# EAGLE board TMP006 Breakout-Panel-v11 (EAGLE 6.5.0), part 1 of 2
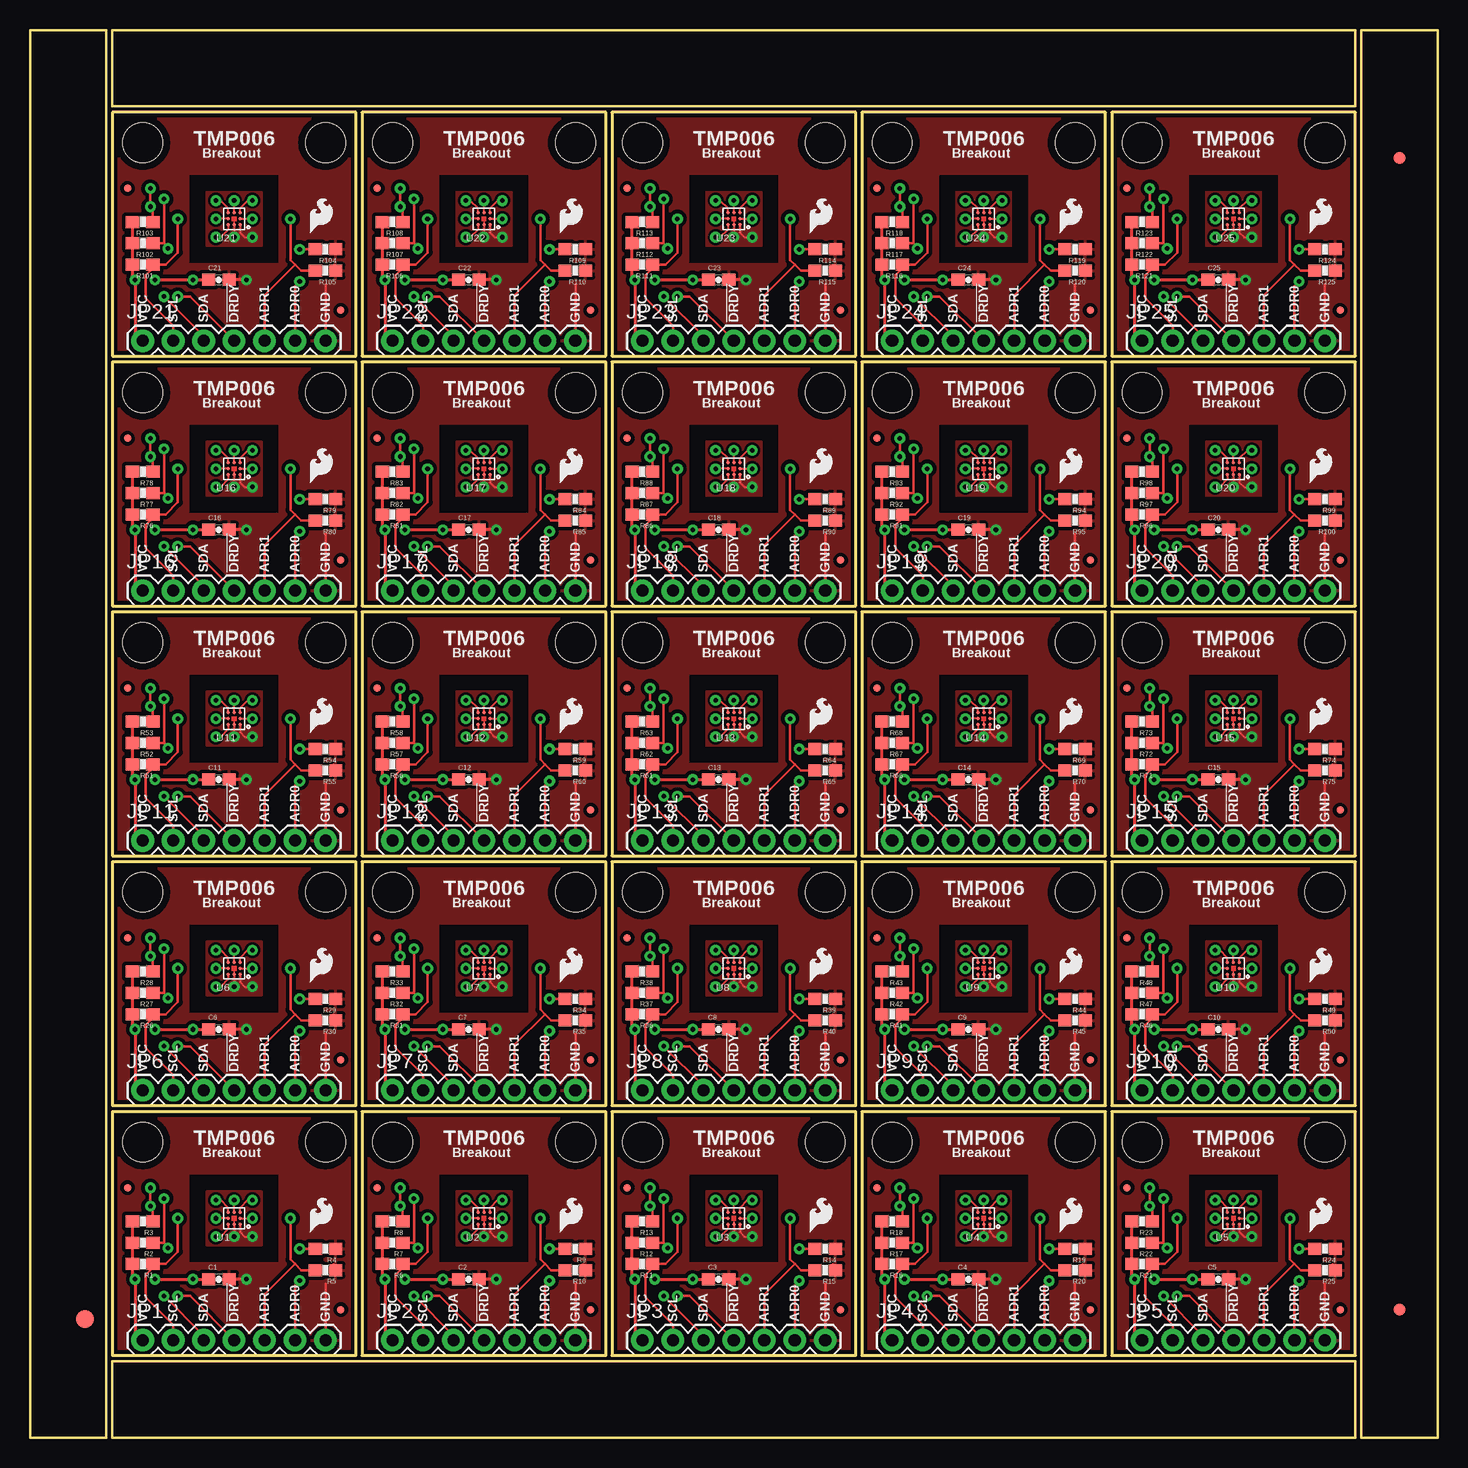
[diagram p0: board, top side]
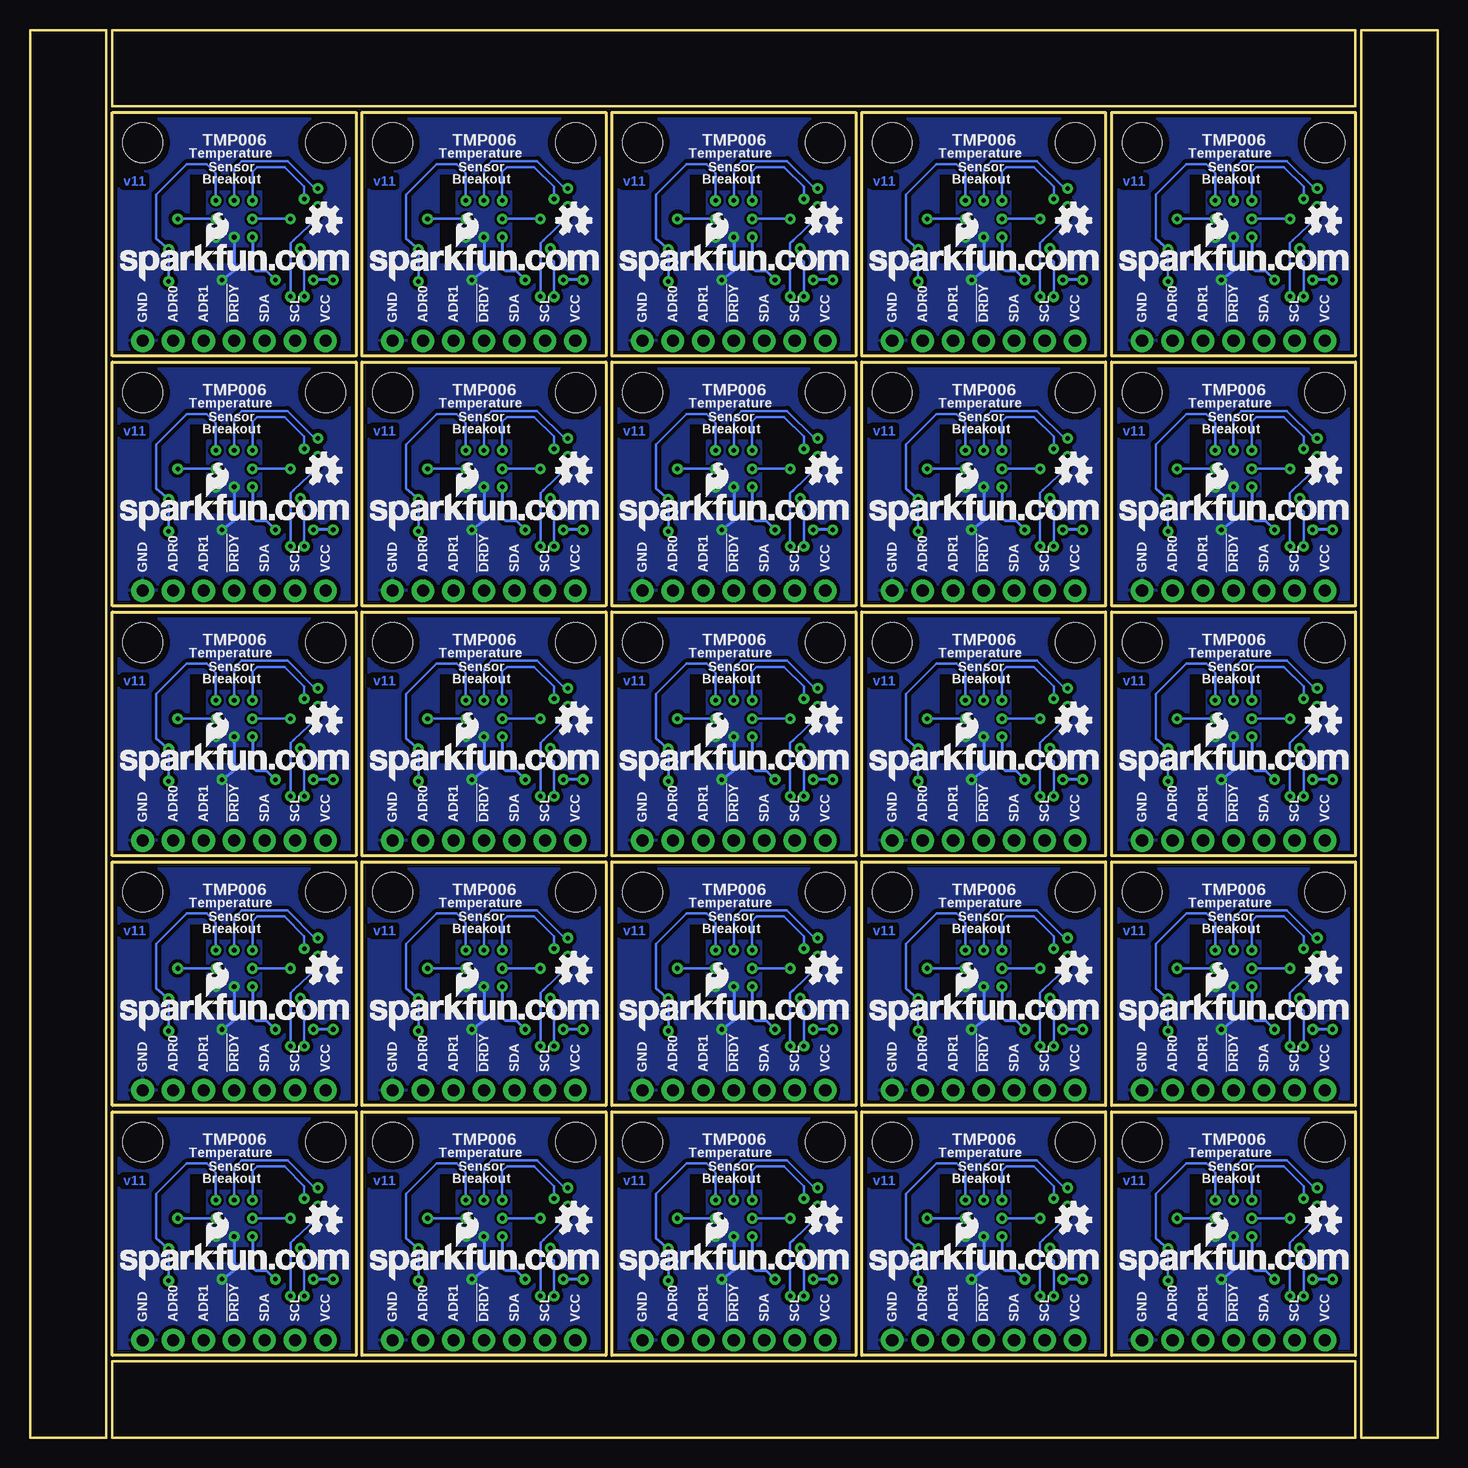
[diagram p1: board, bottom side, seen from below]

Size 117.35 x 117.35 mm. Coordinates in mm from the lower left corner, seen from the top.
Outline: 6.86,27.18 6.86,6.86 27.18,6.86 27.18,27.18 6.86,27.18
Outline: 27.69,27.18 27.69,6.86 48.01,6.86 48.01,27.18 27.69,27.18
Outline: 48.51,27.18 48.51,6.86 68.83,6.86 68.83,27.18 48.51,27.18
Outline: 69.34,27.18 69.34,6.86 89.66,6.86 89.66,27.18 69.34,27.18
Outline: 90.17,27.18 90.17,6.86 110.49,6.86 110.49,27.18 90.17,27.18
Outline: 6.86,48.01 6.86,27.69 27.18,27.69 27.18,48.01 6.86,48.01
Outline: 27.69,48.01 27.69,27.69 48.01,27.69 48.01,48.01 27.69,48.01
Outline: 48.51,48.01 48.51,27.69 68.83,27.69 68.83,48.01 48.51,48.01
Outline: 69.34,48.01 69.34,27.69 89.66,27.69 89.66,48.01 69.34,48.01
Outline: 90.17,48.01 90.17,27.69 110.49,27.69 110.49,48.01 90.17,48.01
Outline: 6.86,68.83 6.86,48.51 27.18,48.51 27.18,68.83 6.86,68.83
Outline: 27.69,68.83 27.69,48.51 48.01,48.51 48.01,68.83 27.69,68.83
Outline: 48.51,68.83 48.51,48.51 68.83,48.51 68.83,68.83 48.51,68.83
Outline: 69.34,68.83 69.34,48.51 89.66,48.51 89.66,68.83 69.34,68.83
Outline: 90.17,68.83 90.17,48.51 110.49,48.51 110.49,68.83 90.17,68.83
Outline: 6.86,89.66 6.86,69.34 27.18,69.34 27.18,89.66 6.86,89.66
Outline: 27.69,89.66 27.69,69.34 48.01,69.34 48.01,89.66 27.69,89.66
Outline: 48.51,89.66 48.51,69.34 68.83,69.34 68.83,89.66 48.51,89.66
Outline: 69.34,89.66 69.34,69.34 89.66,69.34 89.66,89.66 69.34,89.66
Outline: 90.17,89.66 90.17,69.34 110.49,69.34 110.49,89.66 90.17,89.66
Outline: 6.86,110.49 6.86,90.17 27.18,90.17 27.18,110.49 6.86,110.49
Outline: 27.69,110.49 27.69,90.17 48.01,90.17 48.01,110.49 27.69,110.49
Outline: 48.51,110.49 48.51,90.17 68.83,90.17 68.83,110.49 48.51,110.49
Outline: 69.34,110.49 69.34,90.17 89.66,90.17 89.66,110.49 69.34,110.49
Outline: 90.17,110.49 90.17,90.17 110.49,90.17 110.49,110.49 90.17,110.49
Outline: 6.35,0 6.35,117.35 0,117.35 0,0 6.35,0
Outline: 6.86,0 110.49,0 110.49,6.35 6.86,6.35 6.86,0
Outline: 117.35,0 117.35,117.35 111,117.35 111,0 117.35,0
Outline: 110.49,117.35 6.86,117.35 6.86,111 110.49,111 110.49,117.35
Copper layers (1*16): Top 0.035mm / dielectric 1.5mm / Bottom 0.035mm
Design rules "default": minimum track width 6mil, minimum drill 15mil, track to track 8mil, track to pad 8mil, pad to pad 8mil, via to via 8mil, smd to smd 8mil, copper to edge 8mil, drill to drill 8mil, minimum pad ring 12mil, minimum via ring 10mil, stop-mask expansion 4mil, vias tented up to drill 20mil, thermal gap 10mil
tRestrict: area 17.1,17.7 to 17.4,17.9; area 17.7,17.7 to 17.9,17.9; area 38,17.7 to 38.2,17.9; area 38.5,17.7 to 38.7,17.9; area 58.8,17.7 to 59.1,17.9; area 59.3,17.7 to 59.6,17.9; area 79.6,17.7 to 79.9,17.9; area 80.1,17.7 to 80.4,17.9; area 100.5,17.7 to 100.7,17.9; area 101,17.7 to 101.2,17.9; area 17.1,38.5 to 17.4,38.7; area 17.7,38.5 to 17.9,38.7; area 38,38.5 to 38.2,38.7; area 38.5,38.5 to 38.7,38.7; area 58.8,38.5 to 59.1,38.7; area 59.3,38.5 to 59.6,38.7; area 79.6,38.5 to 79.9,38.7; area 80.1,38.5 to 80.4,38.7; area 100.5,38.5 to 100.7,38.7; area 101,38.5 to 101.2,38.7; area 17.1,59.3 to 17.4,59.6; area 17.7,59.3 to 17.9,59.6; area 38,59.3 to 38.2,59.6; area 38.5,59.3 to 38.7,59.6; area 58.8,59.3 to 59.1,59.6; area 59.3,59.3 to 59.6,59.6; area 79.6,59.3 to 79.9,59.6; area 80.1,59.3 to 80.4,59.6; area 100.5,59.3 to 100.7,59.6; area 101,59.3 to 101.2,59.6; area 17.1,80.1 to 17.4,80.4; area 17.7,80.1 to 17.9,80.4; area 38,80.1 to 38.2,80.4; area 38.5,80.1 to 38.7,80.4; area 58.8,80.1 to 59.1,80.4; area 59.3,80.1 to 59.6,80.4; area 79.6,80.1 to 79.9,80.4; area 80.1,80.1 to 80.4,80.4; area 100.5,80.1 to 100.7,80.4; area 101,80.1 to 101.2,80.4; area 17.1,101 to 17.4,101.2; area 17.7,101 to 17.9,101.2; area 38,101 to 38.2,101.2; area 38.5,101 to 38.7,101.2; area 58.8,101 to 59.1,101.2; area 59.3,101 to 59.6,101.2; area 79.6,101 to 79.9,101.2; area 80.1,101 to 80.4,101.2; area 100.5,101 to 100.7,101.2; area 101,101 to 101.2,101.2

## Footprints (pad centres in the part's own frame; a part is rotated, then mirrored left to right if it is on the bottom)
0603-CAP = smd 1.1 x 1: 1 -0.85,0; 2 0.85,0
FIDUCIAL-1.5X3 = smd 1.5 x 1.5: 1 0,0
FIDUCIAL-1X2 = smd 1 x 1: 1 0,0
MICRO-FIDUCIAL = smd 0.635 x 0.635: 1 0,0
1X07 = drill 1.016 pad 1.88: 1 0,0; 2 2.54,0; 3 5.08,0; 4 7.62,0; 5 10.16,0; 6 12.7,0; 7 15.24,0
0603-RES = smd 1.1 x 1: 1 -0.85,0; 2 0.85,0
STAND-OFF = hole 3.302: 0,0
BGA8DS = smd 0.305 x 0.305: A1 0.5,-0.5; A2 0,-0.5; A3 -0.5,-0.5; B1 0.5,0; B3 -0.5,0; C1 0.5,0.5; C2 0,0.5; C3 -0.5,0.5

## Placement (x,y rotation side)
C1  0.1uF  [0603-CAP]  15.75,13.21 0 top
C2  0.1uF  [0603-CAP]  36.58,13.21 0 top
C3  0.1uF  [0603-CAP]  57.4,13.21 0 top
C4  0.1uF  [0603-CAP]  78.23,13.21 0 top
C5  0.1uF  [0603-CAP]  99.06,13.21 0 top
C6  0.1uF  [0603-CAP]  15.75,34.04 0 top
C7  0.1uF  [0603-CAP]  36.58,34.04 0 top
C8  0.1uF  [0603-CAP]  57.4,34.04 0 top
C9  0.1uF  [0603-CAP]  78.23,34.04 0 top
C10  0.1uF  [0603-CAP]  99.06,34.04 0 top
C11  0.1uF  [0603-CAP]  15.75,54.86 0 top
C12  0.1uF  [0603-CAP]  36.58,54.86 0 top
C13  0.1uF  [0603-CAP]  57.4,54.86 0 top
C14  0.1uF  [0603-CAP]  78.23,54.86 0 top
C15  0.1uF  [0603-CAP]  99.06,54.86 0 top
C16  0.1uF  [0603-CAP]  15.75,75.69 0 top
C17  0.1uF  [0603-CAP]  36.58,75.69 0 top
C18  0.1uF  [0603-CAP]  57.4,75.69 0 top
C19  0.1uF  [0603-CAP]  78.23,75.69 0 top
C20  0.1uF  [0603-CAP]  99.06,75.69 0 top
C21  0.1uF  [0603-CAP]  15.75,96.52 0 top
C22  0.1uF  [0603-CAP]  36.58,96.52 0 top
C23  0.1uF  [0603-CAP]  57.4,96.52 0 top
C24  0.1uF  [0603-CAP]  78.23,96.52 0 top
C25  0.1uF  [0603-CAP]  99.06,96.52 0 top
E$1  [FIDUCIAL-1.5X3]  4.57,9.91 0 top
E$4  [FIDUCIAL-1X2]  114.17,10.67 0 top
E$5  [FIDUCIAL-1X2]  114.17,106.68 180 top
FID1  FIDUCIALUFIDUCIAL  [MICRO-FIDUCIAL]  8.13,20.83 0 top
FID2  FIDUCIALUFIDUCIAL  [MICRO-FIDUCIAL]  25.91,10.67 0 top
FID3  FIDUCIALUFIDUCIAL  [MICRO-FIDUCIAL]  28.96,20.83 0 top
FID4  FIDUCIALUFIDUCIAL  [MICRO-FIDUCIAL]  46.74,10.67 0 top
FID5  FIDUCIALUFIDUCIAL  [MICRO-FIDUCIAL]  49.78,20.83 0 top
FID6  FIDUCIALUFIDUCIAL  [MICRO-FIDUCIAL]  67.56,10.67 0 top
FID7  FIDUCIALUFIDUCIAL  [MICRO-FIDUCIAL]  70.61,20.83 0 top
FID8  FIDUCIALUFIDUCIAL  [MICRO-FIDUCIAL]  88.39,10.67 0 top
FID9  FIDUCIALUFIDUCIAL  [MICRO-FIDUCIAL]  91.44,20.83 0 top
FID10  FIDUCIALUFIDUCIAL  [MICRO-FIDUCIAL]  109.22,10.67 0 top
FID11  FIDUCIALUFIDUCIAL  [MICRO-FIDUCIAL]  8.13,41.66 0 top
FID12  FIDUCIALUFIDUCIAL  [MICRO-FIDUCIAL]  25.91,31.5 0 top
FID13  FIDUCIALUFIDUCIAL  [MICRO-FIDUCIAL]  28.96,41.66 0 top
FID14  FIDUCIALUFIDUCIAL  [MICRO-FIDUCIAL]  46.74,31.5 0 top
FID15  FIDUCIALUFIDUCIAL  [MICRO-FIDUCIAL]  49.78,41.66 0 top
FID16  FIDUCIALUFIDUCIAL  [MICRO-FIDUCIAL]  67.56,31.5 0 top
FID17  FIDUCIALUFIDUCIAL  [MICRO-FIDUCIAL]  70.61,41.66 0 top
FID18  FIDUCIALUFIDUCIAL  [MICRO-FIDUCIAL]  88.39,31.5 0 top
FID19  FIDUCIALUFIDUCIAL  [MICRO-FIDUCIAL]  91.44,41.66 0 top
FID20  FIDUCIALUFIDUCIAL  [MICRO-FIDUCIAL]  109.22,31.5 0 top
FID21  FIDUCIALUFIDUCIAL  [MICRO-FIDUCIAL]  8.13,62.48 0 top
FID22  FIDUCIALUFIDUCIAL  [MICRO-FIDUCIAL]  25.91,52.32 0 top
FID23  FIDUCIALUFIDUCIAL  [MICRO-FIDUCIAL]  28.96,62.48 0 top
FID24  FIDUCIALUFIDUCIAL  [MICRO-FIDUCIAL]  46.74,52.32 0 top
FID25  FIDUCIALUFIDUCIAL  [MICRO-FIDUCIAL]  49.78,62.48 0 top
FID26  FIDUCIALUFIDUCIAL  [MICRO-FIDUCIAL]  67.56,52.32 0 top
FID27  FIDUCIALUFIDUCIAL  [MICRO-FIDUCIAL]  70.61,62.48 0 top
FID28  FIDUCIALUFIDUCIAL  [MICRO-FIDUCIAL]  88.39,52.32 0 top
FID29  FIDUCIALUFIDUCIAL  [MICRO-FIDUCIAL]  91.44,62.48 0 top
FID30  FIDUCIALUFIDUCIAL  [MICRO-FIDUCIAL]  109.22,52.32 0 top
FID31  FIDUCIALUFIDUCIAL  [MICRO-FIDUCIAL]  8.13,83.31 0 top
FID32  FIDUCIALUFIDUCIAL  [MICRO-FIDUCIAL]  25.91,73.15 0 top
FID33  FIDUCIALUFIDUCIAL  [MICRO-FIDUCIAL]  28.96,83.31 0 top
FID34  FIDUCIALUFIDUCIAL  [MICRO-FIDUCIAL]  46.74,73.15 0 top
FID35  FIDUCIALUFIDUCIAL  [MICRO-FIDUCIAL]  49.78,83.31 0 top
FID36  FIDUCIALUFIDUCIAL  [MICRO-FIDUCIAL]  67.56,73.15 0 top
FID37  FIDUCIALUFIDUCIAL  [MICRO-FIDUCIAL]  70.61,83.31 0 top
FID38  FIDUCIALUFIDUCIAL  [MICRO-FIDUCIAL]  88.39,73.15 0 top
FID39  FIDUCIALUFIDUCIAL  [MICRO-FIDUCIAL]  91.44,83.31 0 top
FID40  FIDUCIALUFIDUCIAL  [MICRO-FIDUCIAL]  109.22,73.15 0 top
FID41  FIDUCIALUFIDUCIAL  [MICRO-FIDUCIAL]  8.13,104.14 0 top
FID42  FIDUCIALUFIDUCIAL  [MICRO-FIDUCIAL]  25.91,93.98 0 top
FID43  FIDUCIALUFIDUCIAL  [MICRO-FIDUCIAL]  28.96,104.14 0 top
FID44  FIDUCIALUFIDUCIAL  [MICRO-FIDUCIAL]  46.74,93.98 0 top
FID45  FIDUCIALUFIDUCIAL  [MICRO-FIDUCIAL]  49.78,104.14 0 top
FID46  FIDUCIALUFIDUCIAL  [MICRO-FIDUCIAL]  67.56,93.98 0 top
FID47  FIDUCIALUFIDUCIAL  [MICRO-FIDUCIAL]  70.61,104.14 0 top
FID48  FIDUCIALUFIDUCIAL  [MICRO-FIDUCIAL]  88.39,93.98 0 top
FID49  FIDUCIALUFIDUCIAL  [MICRO-FIDUCIAL]  91.44,104.14 0 top
FID50  FIDUCIALUFIDUCIAL  [MICRO-FIDUCIAL]  109.22,93.98 0 top
JP1  [1X07]  9.4,8.13 0 top
JP2  [1X07]  30.23,8.13 0 top
JP3  [1X07]  51.05,8.13 0 top
JP4  [1X07]  71.88,8.13 0 top
JP5  [1X07]  92.71,8.13 0 top
JP6  [1X07]  9.4,28.96 0 top
JP7  [1X07]  30.23,28.96 0 top
JP8  [1X07]  51.05,28.96 0 top
JP9  [1X07]  71.88,28.96 0 top
JP10  [1X07]  92.71,28.96 0 top
JP11  [1X07]  9.4,49.78 0 top
JP12  [1X07]  30.23,49.78 0 top
JP13  [1X07]  51.05,49.78 0 top
JP14  [1X07]  71.88,49.78 0 top
JP15  [1X07]  92.71,49.78 0 top
JP16  [1X07]  9.4,70.61 0 top
JP17  [1X07]  30.23,70.61 0 top
JP18  [1X07]  51.05,70.61 0 top
JP19  [1X07]  71.88,70.61 0 top
JP20  [1X07]  92.71,70.61 0 top
JP21  [1X07]  9.4,91.44 0 top
JP22  [1X07]  30.23,91.44 0 top
JP23  [1X07]  51.05,91.44 0 top
JP24  [1X07]  71.88,91.44 0 top
JP25  [1X07]  92.71,91.44 0 top
LOGO1  LOGO-SFESK  [SFE-LOGO-FLAME]  23.37,17.14 0 top
LOGO2  OSHW-LOGOS  [OSHW-LOGO-S]  9.53,18.16 0 bottom
LOGO3  LOGO-SFENEW  [SFE-NEW-WEBLOGO]  26.54,13.08 0 bottom
LOGO4  LOGO-SFESK  [SFE-LOGO-FLAME]  44.2,17.14 0 top
LOGO5  OSHW-LOGOS  [OSHW-LOGO-S]  30.35,18.16 0 bottom
LOGO6  LOGO-SFENEW  [SFE-NEW-WEBLOGO]  47.37,13.08 0 bottom
LOGO7  LOGO-SFESK  [SFE-LOGO-FLAME]  65.02,17.14 0 top
LOGO8  OSHW-LOGOS  [OSHW-LOGO-S]  51.18,18.16 0 bottom
LOGO9  LOGO-SFENEW  [SFE-NEW-WEBLOGO]  68.2,13.08 0 bottom
LOGO10  LOGO-SFESK  [SFE-LOGO-FLAME]  85.85,17.14 0 top
LOGO11  OSHW-LOGOS  [OSHW-LOGO-S]  72.01,18.16 0 bottom
LOGO12  LOGO-SFENEW  [SFE-NEW-WEBLOGO]  89.03,13.08 0 bottom
LOGO13  LOGO-SFESK  [SFE-LOGO-FLAME]  106.68,17.14 0 top
LOGO14  OSHW-LOGOS  [OSHW-LOGO-S]  92.84,18.16 0 bottom
LOGO15  LOGO-SFENEW  [SFE-NEW-WEBLOGO]  109.86,13.08 0 bottom
LOGO16  LOGO-SFESK  [SFE-LOGO-FLAME]  23.37,37.97 0 top
LOGO17  OSHW-LOGOS  [OSHW-LOGO-S]  9.53,38.99 0 bottom
LOGO18  LOGO-SFENEW  [SFE-NEW-WEBLOGO]  26.54,33.91 0 bottom
LOGO19  LOGO-SFESK  [SFE-LOGO-FLAME]  44.2,37.97 0 top
LOGO20  OSHW-LOGOS  [OSHW-LOGO-S]  30.35,38.99 0 bottom
LOGO21  LOGO-SFENEW  [SFE-NEW-WEBLOGO]  47.37,33.91 0 bottom
LOGO22  LOGO-SFESK  [SFE-LOGO-FLAME]  65.02,37.97 0 top
LOGO23  OSHW-LOGOS  [OSHW-LOGO-S]  51.18,38.99 0 bottom
LOGO24  LOGO-SFENEW  [SFE-NEW-WEBLOGO]  68.2,33.91 0 bottom
LOGO25  LOGO-SFESK  [SFE-LOGO-FLAME]  85.85,37.97 0 top
LOGO26  OSHW-LOGOS  [OSHW-LOGO-S]  72.01,38.99 0 bottom
LOGO27  LOGO-SFENEW  [SFE-NEW-WEBLOGO]  89.03,33.91 0 bottom
LOGO28  LOGO-SFESK  [SFE-LOGO-FLAME]  106.68,37.97 0 top
LOGO29  OSHW-LOGOS  [OSHW-LOGO-S]  92.84,38.99 0 bottom
LOGO30  LOGO-SFENEW  [SFE-NEW-WEBLOGO]  109.86,33.91 0 bottom
LOGO31  LOGO-SFESK  [SFE-LOGO-FLAME]  23.37,58.8 0 top
LOGO32  OSHW-LOGOS  [OSHW-LOGO-S]  9.53,59.82 0 bottom
LOGO33  LOGO-SFENEW  [SFE-NEW-WEBLOGO]  26.54,54.74 0 bottom
LOGO34  LOGO-SFESK  [SFE-LOGO-FLAME]  44.2,58.8 0 top
LOGO35  OSHW-LOGOS  [OSHW-LOGO-S]  30.35,59.82 0 bottom
LOGO36  LOGO-SFENEW  [SFE-NEW-WEBLOGO]  47.37,54.74 0 bottom
LOGO37  LOGO-SFESK  [SFE-LOGO-FLAME]  65.02,58.8 0 top
LOGO38  OSHW-LOGOS  [OSHW-LOGO-S]  51.18,59.82 0 bottom
LOGO39  LOGO-SFENEW  [SFE-NEW-WEBLOGO]  68.2,54.74 0 bottom
LOGO40  LOGO-SFESK  [SFE-LOGO-FLAME]  85.85,58.8 0 top
LOGO41  OSHW-LOGOS  [OSHW-LOGO-S]  72.01,59.82 0 bottom
LOGO42  LOGO-SFENEW  [SFE-NEW-WEBLOGO]  89.03,54.74 0 bottom
LOGO43  LOGO-SFESK  [SFE-LOGO-FLAME]  106.68,58.8 0 top
LOGO44  OSHW-LOGOS  [OSHW-LOGO-S]  92.84,59.82 0 bottom
LOGO45  LOGO-SFENEW  [SFE-NEW-WEBLOGO]  109.86,54.74 0 bottom
LOGO46  LOGO-SFESK  [SFE-LOGO-FLAME]  23.37,79.63 0 top
LOGO47  OSHW-LOGOS  [OSHW-LOGO-S]  9.53,80.64 0 bottom
LOGO48  LOGO-SFENEW  [SFE-NEW-WEBLOGO]  26.54,75.56 0 bottom
LOGO49  LOGO-SFESK  [SFE-LOGO-FLAME]  44.2,79.63 0 top
LOGO50  OSHW-LOGOS  [OSHW-LOGO-S]  30.35,80.64 0 bottom
LOGO51  LOGO-SFENEW  [SFE-NEW-WEBLOGO]  47.37,75.56 0 bottom
LOGO52  LOGO-SFESK  [SFE-LOGO-FLAME]  65.02,79.63 0 top
LOGO53  OSHW-LOGOS  [OSHW-LOGO-S]  51.18,80.64 0 bottom
LOGO54  LOGO-SFENEW  [SFE-NEW-WEBLOGO]  68.2,75.56 0 bottom
LOGO55  LOGO-SFESK  [SFE-LOGO-FLAME]  85.85,79.63 0 top
LOGO56  OSHW-LOGOS  [OSHW-LOGO-S]  72.01,80.64 0 bottom
LOGO57  LOGO-SFENEW  [SFE-NEW-WEBLOGO]  89.03,75.56 0 bottom
LOGO58  LOGO-SFESK  [SFE-LOGO-FLAME]  106.68,79.63 0 top
LOGO59  OSHW-LOGOS  [OSHW-LOGO-S]  92.84,80.64 0 bottom
LOGO60  LOGO-SFENEW  [SFE-NEW-WEBLOGO]  109.86,75.56 0 bottom
LOGO61  LOGO-SFESK  [SFE-LOGO-FLAME]  23.37,100.46 0 top
LOGO62  OSHW-LOGOS  [OSHW-LOGO-S]  9.53,101.47 0 bottom
LOGO63  LOGO-SFENEW  [SFE-NEW-WEBLOGO]  26.54,96.39 0 bottom
LOGO64  LOGO-SFESK  [SFE-LOGO-FLAME]  44.2,100.46 0 top
LOGO65  OSHW-LOGOS  [OSHW-LOGO-S]  30.35,101.47 0 bottom
LOGO66  LOGO-SFENEW  [SFE-NEW-WEBLOGO]  47.37,96.39 0 bottom
LOGO67  LOGO-SFESK  [SFE-LOGO-FLAME]  65.02,100.46 0 top
LOGO68  OSHW-LOGOS  [OSHW-LOGO-S]  51.18,101.47 0 bottom
LOGO69  LOGO-SFENEW  [SFE-NEW-WEBLOGO]  68.2,96.39 0 bottom
LOGO70  LOGO-SFESK  [SFE-LOGO-FLAME]  85.85,100.46 0 top
LOGO71  OSHW-LOGOS  [OSHW-LOGO-S]  72.01,101.47 0 bottom
LOGO72  LOGO-SFENEW  [SFE-NEW-WEBLOGO]  89.03,96.39 0 bottom
LOGO73  LOGO-SFESK  [SFE-LOGO-FLAME]  106.68,100.46 0 top
LOGO74  OSHW-LOGOS  [OSHW-LOGO-S]  92.84,101.47 0 bottom
LOGO75  LOGO-SFENEW  [SFE-NEW-WEBLOGO]  109.86,96.39 0 bottom
R1  10k  [0603-RES]  9.4,14.48 180 top
R2  10k  [0603-RES]  9.4,16.26 180 top
R3  10k  [0603-RES]  9.4,18.03 180 top
R4  10k  [0603-RES]  24.64,15.75 180 top
R5  10k  [0603-RES]  24.64,13.97 180 top
R6  10k  [0603-RES]  30.23,14.48 180 top
R7  10k  [0603-RES]  30.23,16.26 180 top
R8  10k  [0603-RES]  30.23,18.03 180 top
R9  10k  [0603-RES]  45.47,15.75 180 top
R10  10k  [0603-RES]  45.47,13.97 180 top
R11  10k  [0603-RES]  51.05,14.48 180 top
R12  10k  [0603-RES]  51.05,16.26 180 top
R13  10k  [0603-RES]  51.05,18.03 180 top
R14  10k  [0603-RES]  66.29,15.75 180 top
R15  10k  [0603-RES]  66.29,13.97 180 top
R16  10k  [0603-RES]  71.88,14.48 180 top
R17  10k  [0603-RES]  71.88,16.26 180 top
R18  10k  [0603-RES]  71.88,18.03 180 top
R19  10k  [0603-RES]  87.12,15.75 180 top
R20  10k  [0603-RES]  87.12,13.97 180 top
R21  10k  [0603-RES]  92.71,14.48 180 top
R22  10k  [0603-RES]  92.71,16.26 180 top
R23  10k  [0603-RES]  92.71,18.03 180 top
R24  10k  [0603-RES]  107.95,15.75 180 top
R25  10k  [0603-RES]  107.95,13.97 180 top
R26  10k  [0603-RES]  9.4,35.31 180 top
R27  10k  [0603-RES]  9.4,37.08 180 top
R28  10k  [0603-RES]  9.4,38.86 180 top
R29  10k  [0603-RES]  24.64,36.58 180 top
R30  10k  [0603-RES]  24.64,34.8 180 top
R31  10k  [0603-RES]  30.23,35.31 180 top
R32  10k  [0603-RES]  30.23,37.08 180 top
R33  10k  [0603-RES]  30.23,38.86 180 top
R34  10k  [0603-RES]  45.47,36.58 180 top
R35  10k  [0603-RES]  45.47,34.8 180 top
R36  10k  [0603-RES]  51.05,35.31 180 top
R37  10k  [0603-RES]  51.05,37.08 180 top
R38  10k  [0603-RES]  51.05,38.86 180 top
R39  10k  [0603-RES]  66.29,36.58 180 top
R40  10k  [0603-RES]  66.29,34.8 180 top
R41  10k  [0603-RES]  71.88,35.31 180 top
R42  10k  [0603-RES]  71.88,37.08 180 top
R43  10k  [0603-RES]  71.88,38.86 180 top
R44  10k  [0603-RES]  87.12,36.58 180 top
R45  10k  [0603-RES]  87.12,34.8 180 top
R46  10k  [0603-RES]  92.71,35.31 180 top
R47  10k  [0603-RES]  92.71,37.08 180 top
R48  10k  [0603-RES]  92.71,38.86 180 top
R49  10k  [0603-RES]  107.95,36.58 180 top
R50  10k  [0603-RES]  107.95,34.8 180 top
R51  10k  [0603-RES]  9.4,56.13 180 top
R52  10k  [0603-RES]  9.4,57.91 180 top
R53  10k  [0603-RES]  9.4,59.69 180 top
R54  10k  [0603-RES]  24.64,57.4 180 top
R55  10k  [0603-RES]  24.64,55.63 180 top
R56  10k  [0603-RES]  30.23,56.13 180 top
R57  10k  [0603-RES]  30.23,57.91 180 top
R58  10k  [0603-RES]  30.23,59.69 180 top
R59  10k  [0603-RES]  45.47,57.4 180 top
R60  10k  [0603-RES]  45.47,55.63 180 top
R61  10k  [0603-RES]  51.05,56.13 180 top
R62  10k  [0603-RES]  51.05,57.91 180 top
R63  10k  [0603-RES]  51.05,59.69 180 top
R64  10k  [0603-RES]  66.29,57.4 180 top
R65  10k  [0603-RES]  66.29,55.63 180 top
R66  10k  [0603-RES]  71.88,56.13 180 top
R67  10k  [0603-RES]  71.88,57.91 180 top
R68  10k  [0603-RES]  71.88,59.69 180 top
R69  10k  [0603-RES]  87.12,57.4 180 top
R70  10k  [0603-RES]  87.12,55.63 180 top
R71  10k  [0603-RES]  92.71,56.13 180 top
R72  10k  [0603-RES]  92.71,57.91 180 top
R73  10k  [0603-RES]  92.71,59.69 180 top
R74  10k  [0603-RES]  107.95,57.4 180 top
R75  10k  [0603-RES]  107.95,55.63 180 top
R76  10k  [0603-RES]  9.4,76.96 180 top
R77  10k  [0603-RES]  9.4,78.74 180 top
R78  10k  [0603-RES]  9.4,80.52 180 top
R79  10k  [0603-RES]  24.64,78.23 180 top
R80  10k  [0603-RES]  24.64,76.45 180 top
R81  10k  [0603-RES]  30.23,76.96 180 top
R82  10k  [0603-RES]  30.23,78.74 180 top
R83  10k  [0603-RES]  30.23,80.52 180 top
R84  10k  [0603-RES]  45.47,78.23 180 top
R85  10k  [0603-RES]  45.47,76.45 180 top
R86  10k  [0603-RES]  51.05,76.96 180 top
R87  10k  [0603-RES]  51.05,78.74 180 top
R88  10k  [0603-RES]  51.05,80.52 180 top
R89  10k  [0603-RES]  66.29,78.23 180 top
R90  10k  [0603-RES]  66.29,76.45 180 top
R91  10k  [0603-RES]  71.88,76.96 180 top
R92  10k  [0603-RES]  71.88,78.74 180 top
R93  10k  [0603-RES]  71.88,80.52 180 top
R94  10k  [0603-RES]  87.12,78.23 180 top
R95  10k  [0603-RES]  87.12,76.45 180 top
R96  10k  [0603-RES]  92.71,76.96 180 top
R97  10k  [0603-RES]  92.71,78.74 180 top
R98  10k  [0603-RES]  92.71,80.52 180 top
R99  10k  [0603-RES]  107.95,78.23 180 top
R100  10k  [0603-RES]  107.95,76.45 180 top
R101  10k  [0603-RES]  9.4,97.79 180 top
R102  10k  [0603-RES]  9.4,99.57 180 top
R103  10k  [0603-RES]  9.4,101.35 180 top
R104  10k  [0603-RES]  24.64,99.06 180 top
R105  10k  [0603-RES]  24.64,97.28 180 top
R106  10k  [0603-RES]  30.23,97.79 180 top
R107  10k  [0603-RES]  30.23,99.57 180 top
R108  10k  [0603-RES]  30.23,101.35 180 top
R109  10k  [0603-RES]  45.47,99.06 180 top
R110  10k  [0603-RES]  45.47,97.28 180 top
R111  10k  [0603-RES]  51.05,97.79 180 top
R112  10k  [0603-RES]  51.05,99.57 180 top
R113  10k  [0603-RES]  51.05,101.35 180 top
R114  10k  [0603-RES]  66.29,99.06 180 top
R115  10k  [0603-RES]  66.29,97.28 180 top
R116  10k  [0603-RES]  71.88,97.79 180 top
R117  10k  [0603-RES]  71.88,99.57 180 top
R118  10k  [0603-RES]  71.88,101.35 180 top
R119  10k  [0603-RES]  87.12,99.06 180 top
R120  10k  [0603-RES]  87.12,97.28 180 top
R121  10k  [0603-RES]  92.71,97.79 180 top
R122  10k  [0603-RES]  92.71,99.57 180 top
R123  10k  [0603-RES]  92.71,101.35 180 top
R124  10k  [0603-RES]  107.95,99.06 180 top
R125  10k  [0603-RES]  107.95,97.28 180 top
STANDOFF1  STAND-OFF  [STAND-OFF]  9.4,24.64 0 top
STANDOFF2  STAND-OFF  [STAND-OFF]  24.64,24.64 0 top
STANDOFF3  STAND-OFF  [STAND-OFF]  30.23,24.64 0 top
STANDOFF4  STAND-OFF  [STAND-OFF]  45.47,24.64 0 top
STANDOFF5  STAND-OFF  [STAND-OFF]  51.05,24.64 0 top
STANDOFF6  STAND-OFF  [STAND-OFF]  66.29,24.64 0 top
STANDOFF7  STAND-OFF  [STAND-OFF]  71.88,24.64 0 top
STANDOFF8  STAND-OFF  [STAND-OFF]  87.12,24.64 0 top
STANDOFF9  STAND-OFF  [STAND-OFF]  92.71,24.64 0 top
STANDOFF10  STAND-OFF  [STAND-OFF]  107.95,24.64 0 top
STANDOFF11  STAND-OFF  [STAND-OFF]  9.4,45.47 0 top
STANDOFF12  STAND-OFF  [STAND-OFF]  24.64,45.47 0 top
STANDOFF13  STAND-OFF  [STAND-OFF]  30.23,45.47 0 top
STANDOFF14  STAND-OFF  [STAND-OFF]  45.47,45.47 0 top
STANDOFF15  STAND-OFF  [STAND-OFF]  51.05,45.47 0 top
STANDOFF16  STAND-OFF  [STAND-OFF]  66.29,45.47 0 top
STANDOFF17  STAND-OFF  [STAND-OFF]  71.88,45.47 0 top
STANDOFF18  STAND-OFF  [STAND-OFF]  87.12,45.47 0 top
STANDOFF19  STAND-OFF  [STAND-OFF]  92.71,45.47 0 top
STANDOFF20  STAND-OFF  [STAND-OFF]  107.95,45.47 0 top
STANDOFF21  STAND-OFF  [STAND-OFF]  9.4,66.29 0 top
STANDOFF22  STAND-OFF  [STAND-OFF]  24.64,66.29 0 top
STANDOFF23  STAND-OFF  [STAND-OFF]  30.23,66.29 0 top
STANDOFF24  STAND-OFF  [STAND-OFF]  45.47,66.29 0 top
STANDOFF25  STAND-OFF  [STAND-OFF]  51.05,66.29 0 top
STANDOFF26  STAND-OFF  [STAND-OFF]  66.29,66.29 0 top
STANDOFF27  STAND-OFF  [STAND-OFF]  71.88,66.29 0 top
STANDOFF28  STAND-OFF  [STAND-OFF]  87.12,66.29 0 top
STANDOFF29  STAND-OFF  [STAND-OFF]  92.71,66.29 0 top
STANDOFF30  STAND-OFF  [STAND-OFF]  107.95,66.29 0 top
STANDOFF31  STAND-OFF  [STAND-OFF]  9.4,87.12 0 top
STANDOFF32  STAND-OFF  [STAND-OFF]  24.64,87.12 0 top
STANDOFF33  STAND-OFF  [STAND-OFF]  30.23,87.12 0 top
STANDOFF34  STAND-OFF  [STAND-OFF]  45.47,87.12 0 top
STANDOFF35  STAND-OFF  [STAND-OFF]  51.05,87.12 0 top
STANDOFF36  STAND-OFF  [STAND-OFF]  66.29,87.12 0 top
STANDOFF37  STAND-OFF  [STAND-OFF]  71.88,87.12 0 top
STANDOFF38  STAND-OFF  [STAND-OFF]  87.12,87.12 0 top
STANDOFF39  STAND-OFF  [STAND-OFF]  92.71,87.12 0 top
STANDOFF40  STAND-OFF  [STAND-OFF]  107.95,87.12 0 top
STANDOFF41  STAND-OFF  [STAND-OFF]  9.4,107.95 0 top
STANDOFF42  STAND-OFF  [STAND-OFF]  24.64,107.95 0 top
STANDOFF43  STAND-OFF  [STAND-OFF]  30.23,107.95 0 top
STANDOFF44  STAND-OFF  [STAND-OFF]  45.47,107.95 0 top
STANDOFF45  STAND-OFF  [STAND-OFF]  51.05,107.95 0 top
STANDOFF46  STAND-OFF  [STAND-OFF]  66.29,107.95 0 top
STANDOFF47  STAND-OFF  [STAND-OFF]  71.88,107.95 0 top
STANDOFF48  STAND-OFF  [STAND-OFF]  87.12,107.95 0 top
STANDOFF49  STAND-OFF  [STAND-OFF]  92.71,107.95 0 top
STANDOFF50  STAND-OFF  [STAND-OFF]  107.95,107.95 0 top
U1  TMP006  [BGA8DS]  17.02,18.29 0 top
U2  TMP006  [BGA8DS]  37.85,18.29 0 top
U3  TMP006  [BGA8DS]  58.67,18.29 0 top
U4  TMP006  [BGA8DS]  79.5,18.29 0 top
U5  TMP006  [BGA8DS]  100.33,18.29 0 top
U6  TMP006  [BGA8DS]  17.02,39.12 0 top
U7  TMP006  [BGA8DS]  37.85,39.12 0 top
U8  TMP006  [BGA8DS]  58.67,39.12 0 top
U9  TMP006  [BGA8DS]  79.5,39.12 0 top
U10  TMP006  [BGA8DS]  100.33,39.12 0 top
U11  TMP006  [BGA8DS]  17.02,59.94 0 top
U12  TMP006  [BGA8DS]  37.85,59.94 0 top
U13  TMP006  [BGA8DS]  58.67,59.94 0 top
U14  TMP006  [BGA8DS]  79.5,59.94 0 top
U15  TMP006  [BGA8DS]  100.33,59.94 0 top
U16  TMP006  [BGA8DS]  17.02,80.77 0 top
U17  TMP006  [BGA8DS]  37.85,80.77 0 top
U18  TMP006  [BGA8DS]  58.67,80.77 0 top
U19  TMP006  [BGA8DS]  79.5,80.77 0 top
U20  TMP006  [BGA8DS]  100.33,80.77 0 top
U21  TMP006  [BGA8DS]  17.02,101.6 0 top
U22  TMP006  [BGA8DS]  37.85,101.6 0 top
U23  TMP006  [BGA8DS]  58.67,101.6 0 top
U24  TMP006  [BGA8DS]  79.5,101.6 0 top
U25  TMP006  [BGA8DS]  100.33,101.6 0 top

## Library data of the parts
C1-C25 = SparkFun-Capacitors
E$1 E$4 E$5 FID1-FID50 LOGO1-LOGO75 = SparkFun-Aesthetics
JP1-JP25 = SparkFun-Connectors
R1-R125 = SparkFun-Resistors
STANDOFF1-STANDOFF50 = SparkFun-Electromechanical
U1-U25 = SparkFun-DigitalIC

## Nets
!DRDY: JP1.4 R3.1 U1.C2
!DRDY1: JP2.4 R8.1 U2.C2
!DRDY2: JP3.4 R13.1 U3.C2
!DRDY3: JP4.4 R18.1 U4.C2
!DRDY4: JP5.4 R23.1 U5.C2
!DRDY5: JP6.4 R28.1 U6.C2
!DRDY6: JP7.4 R33.1 U7.C2
!DRDY7: JP8.4 R38.1 U8.C2
!DRDY8: JP9.4 R43.1 U9.C2
!DRDY9: JP10.4 R48.1 U10.C2
!DRDY10: JP11.4 R53.1 U11.C2
!DRDY11: JP12.4 R58.1 U12.C2
!DRDY12: JP13.4 R63.1 U13.C2
!DRDY13: JP14.4 R68.1 U14.C2
!DRDY14: JP15.4 R73.1 U15.C2
!DRDY15: JP16.4 R78.1 U16.C2
!DRDY16: JP17.4 R83.1 U17.C2
!DRDY17: JP18.4 R88.1 U18.C2
!DRDY18: JP19.4 R93.1 U19.C2
!DRDY19: JP20.4 R98.1 U20.C2
!DRDY20: JP21.4 R103.1 U21.C2
!DRDY21: JP22.4 R108.1 U22.C2
!DRDY22: JP23.4 R113.1 U23.C2
!DRDY23: JP24.4 R118.1 U24.C2
!DRDY24: JP25.4 R123.1 U25.C2
ADR0: JP1.6 R4.2 U1.C1
ADR1: JP1.5 R5.2 U1.B1
ADR2: JP2.6 R9.2 U2.C1
ADR3: JP2.5 R10.2 U2.B1
ADR4: JP3.6 R14.2 U3.C1
ADR5: JP3.5 R15.2 U3.B1
ADR6: JP4.6 R19.2 U4.C1
ADR7: JP4.5 R20.2 U4.B1
ADR8: JP5.6 R24.2 U5.C1
ADR9: JP5.5 R25.2 U5.B1
ADR10: JP6.6 R29.2 U6.C1
ADR11: JP6.5 R30.2 U6.B1
ADR12: JP7.6 R34.2 U7.C1
ADR13: JP7.5 R35.2 U7.B1
ADR14: JP8.6 R39.2 U8.C1
ADR15: JP8.5 R40.2 U8.B1
ADR16: JP9.6 R44.2 U9.C1
ADR17: JP9.5 R45.2 U9.B1
ADR18: JP10.6 R49.2 U10.C1
ADR19: JP10.5 R50.2 U10.B1
ADR20: JP11.6 R54.2 U11.C1
ADR21: JP11.5 R55.2 U11.B1
ADR22: JP12.6 R59.2 U12.C1
ADR23: JP12.5 R60.2 U12.B1
ADR24: JP13.6 R64.2 U13.C1
ADR25: JP13.5 R65.2 U13.B1
ADR26: JP14.6 R69.2 U14.C1
ADR27: JP14.5 R70.2 U14.B1
ADR28: JP15.6 R74.2 U15.C1
ADR29: JP15.5 R75.2 U15.B1
ADR30: JP16.6 R79.2 U16.C1
ADR31: JP16.5 R80.2 U16.B1
ADR32: JP17.6 R84.2 U17.C1
ADR33: JP17.5 R85.2 U17.B1
ADR34: JP18.6 R89.2 U18.C1
ADR35: JP18.5 R90.2 U18.B1
ADR36: JP19.6 R94.2 U19.C1
ADR37: JP19.5 R95.2 U19.B1
ADR38: JP20.6 R99.2 U20.C1
ADR39: JP20.5 R100.2 U20.B1
ADR40: JP21.6 R104.2 U21.C1
ADR41: JP21.5 R105.2 U21.B1
ADR42: JP22.6 R109.2 U22.C1
ADR43: JP22.5 R110.2 U22.B1
ADR44: JP23.6 R114.2 U23.C1
ADR45: JP23.5 R115.2 U23.B1
ADR46: JP24.6 R119.2 U24.C1
ADR47: JP24.5 R120.2 U24.B1
ADR48: JP25.6 R124.2 U25.C1
ADR49: JP25.5 R125.2 U25.B1
GND: C1.2 JP1.7 R4.1 R5.1 U1.A1 U1.A2
GND1: C2.2 JP2.7 R9.1 R10.1 U2.A1 U2.A2
GND2: C3.2 JP3.7 R14.1 R15.1 U3.A1 U3.A2
GND3: C4.2 JP4.7 R19.1 R20.1 U4.A1 U4.A2
GND4: C5.2 JP5.7 R24.1 R25.1 U5.A1 U5.A2
GND5: C6.2 JP6.7 R29.1 R30.1 U6.A1 U6.A2
GND6: C7.2 JP7.7 R34.1 R35.1 U7.A1 U7.A2
GND7: C8.2 JP8.7 R39.1 R40.1 U8.A1 U8.A2
GND8: C9.2 JP9.7 R44.1 R45.1 U9.A1 U9.A2
GND9: C10.2 JP10.7 R49.1 R50.1 U10.A1 U10.A2
GND10: C11.2 JP11.7 R54.1 R55.1 U11.A1 U11.A2
GND11: C12.2 JP12.7 R59.1 R60.1 U12.A1 U12.A2
GND12: C13.2 JP13.7 R64.1 R65.1 U13.A1 U13.A2
GND13: C14.2 JP14.7 R69.1 R70.1 U14.A1 U14.A2
GND14: C15.2 JP15.7 R74.1 R75.1 U15.A1 U15.A2
GND15: C16.2 JP16.7 R79.1 R80.1 U16.A1 U16.A2
GND16: C17.2 JP17.7 R84.1 R85.1 U17.A1 U17.A2
GND17: C18.2 JP18.7 R89.1 R90.1 U18.A1 U18.A2
GND18: C19.2 JP19.7 R94.1 R95.1 U19.A1 U19.A2
GND19: C20.2 JP20.7 R99.1 R100.1 U20.A1 U20.A2
GND20: C21.2 JP21.7 R104.1 R105.1 U21.A1 U21.A2
GND21: C22.2 JP22.7 R109.1 R110.1 U22.A1 U22.A2
GND22: C23.2 JP23.7 R114.1 R115.1 U23.A1 U23.A2
GND23: C24.2 JP24.7 R119.1 R120.1 U24.A1 U24.A2
GND24: C25.2 JP25.7 R124.1 R125.1 U25.A1 U25.A2
SCL: JP1.2 R1.1 U1.B3
SCL1: JP2.2 R6.1 U2.B3
SCL2: JP3.2 R11.1 U3.B3
SCL3: JP4.2 R16.1 U4.B3
SCL4: JP5.2 R21.1 U5.B3
SCL5: JP6.2 R26.1 U6.B3
SCL6: JP7.2 R31.1 U7.B3
SCL7: JP8.2 R36.1 U8.B3
SCL8: JP9.2 R41.1 U9.B3
SCL9: JP10.2 R46.1 U10.B3
SCL10: JP11.2 R51.1 U11.B3
SCL11: JP12.2 R56.1 U12.B3
SCL12: JP13.2 R61.1 U13.B3
SCL13: JP14.2 R66.1 U14.B3
SCL14: JP15.2 R71.1 U15.B3
SCL15: JP16.2 R76.1 U16.B3
SCL16: JP17.2 R81.1 U17.B3
SCL17: JP18.2 R86.1 U18.B3
SCL18: JP19.2 R91.1 U19.B3
SCL19: JP20.2 R96.1 U20.B3
SCL20: JP21.2 R101.1 U21.B3
SCL21: JP22.2 R106.1 U22.B3
SCL22: JP23.2 R111.1 U23.B3
SCL23: JP24.2 R116.1 U24.B3
SCL24: JP25.2 R121.1 U25.B3
SDA: JP1.3 R2.1 U1.C3
SDA1: JP2.3 R7.1 U2.C3
SDA2: JP3.3 R12.1 U3.C3
SDA3: JP4.3 R17.1 U4.C3
SDA4: JP5.3 R22.1 U5.C3
SDA5: JP6.3 R27.1 U6.C3
SDA6: JP7.3 R32.1 U7.C3
SDA7: JP8.3 R37.1 U8.C3
SDA8: JP9.3 R42.1 U9.C3
SDA9: JP10.3 R47.1 U10.C3
SDA10: JP11.3 R52.1 U11.C3
SDA11: JP12.3 R57.1 U12.C3
SDA12: JP13.3 R62.1 U13.C3
SDA13: JP14.3 R67.1 U14.C3
SDA14: JP15.3 R72.1 U15.C3
SDA15: JP16.3 R77.1 U16.C3
SDA16: JP17.3 R82.1 U17.C3
SDA17: JP18.3 R87.1 U18.C3
SDA18: JP19.3 R92.1 U19.C3
SDA19: JP20.3 R97.1 U20.C3
SDA20: JP21.3 R102.1 U21.C3
SDA21: JP22.3 R107.1 U22.C3
SDA22: JP23.3 R112.1 U23.C3
SDA23: JP24.3 R117.1 U24.C3
SDA24: JP25.3 R122.1 U25.C3
VCC: C1.1 JP1.1 R1.2 R2.2 R3.2 U1.A3
VCC1: C2.1 JP2.1 R6.2 R7.2 R8.2 U2.A3
VCC2: C3.1 JP3.1 R11.2 R12.2 R13.2 U3.A3
VCC3: C4.1 JP4.1 R16.2 R17.2 R18.2 U4.A3
VCC4: C5.1 JP5.1 R21.2 R22.2 R23.2 U5.A3
VCC5: C6.1 JP6.1 R26.2 R27.2 R28.2 U6.A3
VCC6: C7.1 JP7.1 R31.2 R32.2 R33.2 U7.A3
VCC7: C8.1 JP8.1 R36.2 R37.2 R38.2 U8.A3
VCC8: C9.1 JP9.1 R41.2 R42.2 R43.2 U9.A3
VCC9: C10.1 JP10.1 R46.2 R47.2 R48.2 U10.A3
VCC10: C11.1 JP11.1 R51.2 R52.2 R53.2 U11.A3
VCC11: C12.1 JP12.1 R56.2 R57.2 R58.2 U12.A3
VCC12: C13.1 JP13.1 R61.2 R62.2 R63.2 U13.A3
VCC13: C14.1 JP14.1 R66.2 R67.2 R68.2 U14.A3
VCC14: C15.1 JP15.1 R71.2 R72.2 R73.2 U15.A3
VCC15: C16.1 JP16.1 R76.2 R77.2 R78.2 U16.A3
VCC16: C17.1 JP17.1 R81.2 R82.2 R83.2 U17.A3
VCC17: C18.1 JP18.1 R86.2 R87.2 R88.2 U18.A3
VCC18: C19.1 JP19.1 R91.2 R92.2 R93.2 U19.A3
VCC19: C20.1 JP20.1 R96.2 R97.2 R98.2 U20.A3
VCC20: C21.1 JP21.1 R101.2 R102.2 R103.2 U21.A3
VCC21: C22.1 JP22.1 R106.2 R107.2 R108.2 U22.A3
VCC22: C23.1 JP23.1 R111.2 R112.2 R113.2 U23.A3
VCC23: C24.1 JP24.1 R116.2 R117.2 R118.2 U24.A3
VCC24: C25.1 JP25.1 R121.2 R122.2 R123.2 U25.A3

## Tracks (layer width: path | path; a pad name or v marks a point on that pad's centre or on a via)
!DRDY  (via drill 0.38)
  Top 0.152: U1.C2 v17.02,19.81
  Top 0.203: v10.03,20.83 v10.03,19.3 10.25,19.09 R3.1 | v12.32,11.81 13.34,11.81 JP1.4
  Bottom 0.203: v17.02,19.81 17.02,22.48 16.38,23.11 12.57,23.11 10.29,20.83 v10.03,20.83 | v12.32,11.81 12.32,16.26 12.06,16.51 10.16,18.29 10.03,18.41 v10.03,19.3
!DRDY1  (via drill 0.38)
  Top 0.152: U2.C2 v37.85,19.81
  Top 0.203: v30.86,20.83 v30.86,19.3 31.08,19.09 R8.1 | v33.15,11.81 34.16,11.81 JP2.4
  Bottom 0.203: v37.85,19.81 37.85,22.48 37.21,23.11 33.4,23.11 31.11,20.83 v30.86,20.83 | v33.15,11.81 33.15,16.26 32.89,16.51 30.99,18.29 30.86,18.41 v30.86,19.3
!DRDY2  (via drill 0.38)
  Top 0.152: U3.C2 v58.67,19.81
  Top 0.203: v51.69,20.83 v51.69,19.3 51.9,19.09 R13.1 | v53.98,11.81 54.99,11.81 JP3.4
  Bottom 0.203: v58.67,19.81 58.67,22.48 58.04,23.11 54.23,23.11 51.94,20.83 v51.69,20.83 | v53.98,11.81 53.98,16.26 53.72,16.51 51.82,18.29 51.69,18.41 v51.69,19.3
!DRDY3  (via drill 0.38)
  Top 0.152: U4.C2 v79.5,19.81
  Top 0.203: v72.52,20.83 v72.52,19.3 72.73,19.09 R18.1 | v74.8,11.81 75.82,11.81 JP4.4
  Bottom 0.203: v79.5,19.81 79.5,22.48 78.87,23.11 75.06,23.11 72.77,20.83 v72.52,20.83 | v74.8,11.81 74.8,16.26 74.55,16.51 72.64,18.29 72.52,18.41 v72.52,19.3
!DRDY4  (via drill 0.38)
  Top 0.152: U5.C2 v100.33,19.81
  Top 0.203: v93.34,20.83 v93.34,19.3 93.56,19.09 R23.1 | v95.63,11.81 96.65,11.81 JP5.4
  Bottom 0.203: v100.33,19.81 100.33,22.48 99.69,23.11 95.89,23.11 93.6,20.83 v93.34,20.83 | v95.63,11.81 95.63,16.26 95.38,16.51 93.47,18.29 93.34,18.41 v93.34,19.3
!DRDY5  (via drill 0.38)
  Top 0.152: U6.C2 v17.02,40.64
  Top 0.203: v10.03,41.66 v10.03,40.13 10.25,39.92 R28.1 | v12.32,32.64 13.34,32.64 JP6.4
  Bottom 0.203: v17.02,40.64 17.02,43.31 16.38,43.94 12.57,43.94 10.29,41.66 v10.03,41.66 | v12.32,32.64 12.32,37.08 12.06,37.34 10.16,39.12 10.03,39.24 v10.03,40.13
!DRDY6  (via drill 0.38)
  Top 0.152: U7.C2 v37.85,40.64
  Top 0.203: v30.86,41.66 v30.86,40.13 31.08,39.92 R33.1 | v33.15,32.64 34.16,32.64 JP7.4
  Bottom 0.203: v37.85,40.64 37.85,43.31 37.21,43.94 33.4,43.94 31.11,41.66 v30.86,41.66 | v33.15,32.64 33.15,37.08 32.89,37.34 30.99,39.12 30.86,39.24 v30.86,40.13
!DRDY7  (via drill 0.38)
  Top 0.152: U8.C2 v58.67,40.64
  Top 0.203: v51.69,41.66 v51.69,40.13 51.9,39.92 R38.1 | v53.98,32.64 54.99,32.64 JP8.4
  Bottom 0.203: v58.67,40.64 58.67,43.31 58.04,43.94 54.23,43.94 51.94,41.66 v51.69,41.66 | v53.98,32.64 53.98,37.08 53.72,37.34 51.82,39.12 51.69,39.24 v51.69,40.13
!DRDY8  (via drill 0.38)
  Top 0.152: U9.C2 v79.5,40.64
  Top 0.203: v72.52,41.66 v72.52,40.13 72.73,39.92 R43.1 | v74.8,32.64 75.82,32.64 JP9.4
  Bottom 0.203: v79.5,40.64 79.5,43.31 78.87,43.94 75.06,43.94 72.77,41.66 v72.52,41.66 | v74.8,32.64 74.8,37.08 74.55,37.34 72.64,39.12 72.52,39.24 v72.52,40.13
!DRDY9  (via drill 0.38)
  Top 0.152: U10.C2 v100.33,40.64
  Top 0.203: v93.34,41.66 v93.34,40.13 93.56,39.92 R48.1 | v95.63,32.64 96.65,32.64 JP10.4
  Bottom 0.203: v100.33,40.64 100.33,43.31 99.69,43.94 95.89,43.94 93.6,41.66 v93.34,41.66 | v95.63,32.64 95.63,37.08 95.38,37.34 93.47,39.12 93.34,39.24 v93.34,40.13
!DRDY10  (via drill 0.38)
  Top 0.152: U11.C2 v17.02,61.47
  Top 0.203: v10.03,62.48 v10.03,60.96 10.25,60.74 R53.1 | v12.32,53.47 13.34,53.47 JP11.4
  Bottom 0.203: v17.02,61.47 17.02,64.14 16.38,64.77 12.57,64.77 10.29,62.48 v10.03,62.48 | v12.32,53.47 12.32,57.91 12.06,58.17 10.16,59.94 10.03,60.07 v10.03,60.96
!DRDY11  (via drill 0.38)
  Top 0.152: U12.C2 v37.85,61.47
  Top 0.203: v30.86,62.48 v30.86,60.96 31.08,60.74 R58.1 | v33.15,53.47 34.16,53.47 JP12.4
  Bottom 0.203: v37.85,61.47 37.85,64.14 37.21,64.77 33.4,64.77 31.11,62.48 v30.86,62.48 | v33.15,53.47 33.15,57.91 32.89,58.17 30.99,59.94 30.86,60.07 v30.86,60.96
!DRDY12  (via drill 0.38)
  Top 0.152: U13.C2 v58.67,61.47
  Top 0.203: v51.69,62.48 v51.69,60.96 51.9,60.74 R63.1 | v53.98,53.47 54.99,53.47 JP13.4
  Bottom 0.203: v58.67,61.47 58.67,64.14 58.04,64.77 54.23,64.77 51.94,62.48 v51.69,62.48 | v53.98,53.47 53.98,57.91 53.72,58.17 51.82,59.94 51.69,60.07 v51.69,60.96
!DRDY13  (via drill 0.38)
  Top 0.152: U14.C2 v79.5,61.47
  Top 0.203: v72.52,62.48 v72.52,60.96 72.73,60.74 R68.1 | v74.8,53.47 75.82,53.47 JP14.4
  Bottom 0.203: v79.5,61.47 79.5,64.14 78.87,64.77 75.06,64.77 72.77,62.48 v72.52,62.48 | v74.8,53.47 74.8,57.91 74.55,58.17 72.64,59.94 72.52,60.07 v72.52,60.96
!DRDY14  (via drill 0.38)
  Top 0.152: U15.C2 v100.33,61.47
  Top 0.203: v93.34,62.48 v93.34,60.96 93.56,60.74 R73.1 | v95.63,53.47 96.65,53.47 JP15.4
  Bottom 0.203: v100.33,61.47 100.33,64.14 99.69,64.77 95.89,64.77 93.6,62.48 v93.34,62.48 | v95.63,53.47 95.63,57.91 95.38,58.17 93.47,59.94 93.34,60.07 v93.34,60.96
!DRDY15  (via drill 0.38)
  Top 0.152: U16.C2 v17.02,82.3
  Top 0.203: v10.03,83.31 v10.03,81.79 10.25,81.57 R78.1 | v12.32,74.3 13.34,74.3 JP16.4
  Bottom 0.203: v17.02,82.3 17.02,84.96 16.38,85.6 12.57,85.6 10.29,83.31 v10.03,83.31 | v12.32,74.3 12.32,78.74 12.06,78.99 10.16,80.77 10.03,80.9 v10.03,81.79
!DRDY16  (via drill 0.38)
  Top 0.152: U17.C2 v37.85,82.3
  Top 0.203: v30.86,83.31 v30.86,81.79 31.08,81.57 R83.1 | v33.15,74.3 34.16,74.3 JP17.4
  Bottom 0.203: v37.85,82.3 37.85,84.96 37.21,85.6 33.4,85.6 31.11,83.31 v30.86,83.31 | v33.15,74.3 33.15,78.74 32.89,78.99 30.99,80.77 30.86,80.9 v30.86,81.79
!DRDY17  (via drill 0.38)
  Top 0.152: U18.C2 v58.67,82.3
  Top 0.203: v51.69,83.31 v51.69,81.79 51.9,81.57 R88.1 | v53.98,74.3 54.99,74.3 JP18.4
  Bottom 0.203: v58.67,82.3 58.67,84.96 58.04,85.6 54.23,85.6 51.94,83.31 v51.69,83.31 | v53.98,74.3 53.98,78.74 53.72,78.99 51.82,80.77 51.69,80.9 v51.69,81.79
!DRDY18  (via drill 0.38)
  Top 0.152: U19.C2 v79.5,82.3
  Top 0.203: v72.52,83.31 v72.52,81.79 72.73,81.57 R93.1 | v74.8,74.3 75.82,74.3 JP19.4
  Bottom 0.203: v79.5,82.3 79.5,84.96 78.87,85.6 75.06,85.6 72.77,83.31 v72.52,83.31 | v74.8,74.3 74.8,78.74 74.55,78.99 72.64,80.77 72.52,80.9 v72.52,81.79
!DRDY19  (via drill 0.38)
  Top 0.152: U20.C2 v100.33,82.3
  Top 0.203: v93.34,83.31 v93.34,81.79 93.56,81.57 R98.1 | v95.63,74.3 96.65,74.3 JP20.4
  Bottom 0.203: v100.33,82.3 100.33,84.96 99.69,85.6 95.89,85.6 93.6,83.31 v93.34,83.31 | v95.63,74.3 95.63,78.74 95.38,78.99 93.47,80.77 93.34,80.9 v93.34,81.79
!DRDY20  (via drill 0.38)
  Top 0.152: U21.C2 v17.02,103.12
  Top 0.203: v10.03,104.14 v10.03,102.62 10.25,102.4 R103.1 | v12.32,95.12 13.34,95.12 JP21.4
  Bottom 0.203: v17.02,103.12 17.02,105.79 16.38,106.43 12.57,106.43 10.29,104.14 v10.03,104.14 | v12.32,95.12 12.32,99.57 12.06,99.82 10.16,101.6 10.03,101.73 v10.03,102.62
!DRDY21  (via drill 0.38)
  Top 0.152: U22.C2 v37.85,103.12
  Top 0.203: v30.86,104.14 v30.86,102.62 31.08,102.4 R108.1 | v33.15,95.12 34.16,95.12 JP22.4
  Bottom 0.203: v37.85,103.12 37.85,105.79 37.21,106.43 33.4,106.43 31.11,104.14 v30.86,104.14 | v33.15,95.12 33.15,99.57 32.89,99.82 30.99,101.6 30.86,101.73 v30.86,102.62
!DRDY22  (via drill 0.38)
  Top 0.152: U23.C2 v58.67,103.12
  Top 0.203: v51.69,104.14 v51.69,102.62 51.9,102.4 R113.1 | v53.98,95.12 54.99,95.12 JP23.4
  Bottom 0.203: v58.67,103.12 58.67,105.79 58.04,106.43 54.23,106.43 51.94,104.14 v51.69,104.14 | v53.98,95.12 53.98,99.57 53.72,99.82 51.82,101.6 51.69,101.73 v51.69,102.62
!DRDY23  (via drill 0.38)
  Top 0.152: U24.C2 v79.5,103.12
  Top 0.203: v72.52,104.14 v72.52,102.62 72.73,102.4 R118.1 | v74.8,95.12 75.82,95.12 JP24.4
  Bottom 0.203: v79.5,103.12 79.5,105.79 78.87,106.43 75.06,106.43 72.77,104.14 v72.52,104.14 | v74.8,95.12 74.8,99.57 74.55,99.82 72.64,101.6 72.52,101.73 v72.52,102.62
!DRDY24  (via drill 0.38)
  Top 0.152: U25.C2 v100.33,103.12
  Top 0.203: v93.34,104.14 v93.34,102.62 93.56,102.4 R123.1 | v95.63,95.12 96.65,95.12 JP25.4
  Bottom 0.203: v100.33,103.12 100.33,105.79 99.69,106.43 95.89,106.43 93.6,104.14 v93.34,104.14 | v95.63,95.12 95.63,99.57 95.38,99.82 93.47,101.6 93.34,101.73 v93.34,102.62
ADR0  (via drill 0.38)
  Top 0.152: U1.C1 17.52,19.17 18.16,19.81 v18.54,19.81
  Top 0.203: JP1.6 22.1,12.7 v22.48,13.08 | v22.48,15.75 R4.2
  Bottom 0.203: v18.54,19.81 18.54,22.1 19.3,22.86 20.95,22.86 23.5,20.32 23.5,16.64 v22.48,15.75 v22.48,13.08
ADR1  (via drill 0.38)
  Top 0.152: U1.B1 v18.54,18.29
  Top 0.203: v21.72,18.29 21.72,14.86 22.1,14.48 | JP1.5 19.56,11.94 22.1,14.48 | R5.2 22.61,13.97 22.1,14.48
  Bottom 0.203: v18.54,18.29 v21.72,18.29
ADR2  (via drill 0.38)
  Top 0.152: U2.C1 38.35,19.17 38.99,19.81 v39.37,19.81
  Top 0.203: JP2.6 42.93,12.7 v43.31,13.08 | v43.31,15.75 R9.2
  Bottom 0.203: v39.37,19.81 39.37,22.1 40.13,22.86 41.78,22.86 44.32,20.32 44.32,16.64 v43.31,15.75 v43.31,13.08
ADR3  (via drill 0.38)
  Top 0.152: U2.B1 v39.37,18.29
  Top 0.203: v42.55,18.29 42.55,14.86 42.93,14.48 | JP2.5 40.39,11.94 42.93,14.48 | R10.2 43.43,13.97 42.93,14.48
  Bottom 0.203: v39.37,18.29 v42.55,18.29
ADR4  (via drill 0.38)
  Top 0.152: U3.C1 59.17,19.17 59.82,19.81 v60.2,19.81
  Top 0.203: JP3.6 63.75,12.7 v64.14,13.08 | v64.14,15.75 R14.2
  Bottom 0.203: v60.2,19.81 60.2,22.1 60.96,22.86 62.61,22.86 65.15,20.32 65.15,16.64 v64.14,15.75 v64.14,13.08
ADR5  (via drill 0.38)
  Top 0.152: U3.B1 v60.2,18.29
  Top 0.203: v63.37,18.29 63.37,14.86 63.75,14.48 | JP3.5 61.21,11.94 63.75,14.48 | R15.2 64.26,13.97 63.75,14.48
  Bottom 0.203: v60.2,18.29 v63.37,18.29
ADR6  (via drill 0.38)
  Top 0.152: U4.C1 80,19.17 80.64,19.81 v81.03,19.81
  Top 0.203: JP4.6 84.58,12.7 v84.96,13.08 | v84.96,15.75 R19.2
  Bottom 0.203: v81.03,19.81 81.03,22.1 81.79,22.86 83.44,22.86 85.98,20.32 85.98,16.64 v84.96,15.75 v84.96,13.08
ADR7  (via drill 0.38)
  Top 0.152: U4.B1 v81.03,18.29
  Top 0.203: v84.2,18.29 84.2,14.86 84.58,14.48 | JP4.5 82.04,11.94 84.58,14.48 | R20.2 85.09,13.97 84.58,14.48
  Bottom 0.203: v81.03,18.29 v84.2,18.29
ADR8  (via drill 0.38)
  Top 0.152: U5.C1 100.83,19.17 101.47,19.81 v101.85,19.81
  Top 0.203: JP5.6 105.41,12.7 v105.79,13.08 | v105.79,15.75 R24.2
  Bottom 0.203: v101.85,19.81 101.85,22.1 102.62,22.86 104.27,22.86 106.81,20.32 106.81,16.64 v105.79,15.75 v105.79,13.08
ADR9  (via drill 0.38)
  Top 0.152: U5.B1 v101.85,18.29
  Top 0.203: v105.03,18.29 105.03,14.86 105.41,14.48 | JP5.5 102.87,11.94 105.41,14.48 | R25.2 105.92,13.97 105.41,14.48
  Bottom 0.203: v101.85,18.29 v105.03,18.29
ADR10  (via drill 0.38)
  Top 0.152: U6.C1 17.52,40 18.16,40.64 v18.54,40.64
  Top 0.203: JP6.6 22.1,33.53 v22.48,33.91 | v22.48,36.58 R29.2
  Bottom 0.203: v18.54,40.64 18.54,42.93 19.3,43.69 20.95,43.69 23.5,41.15 23.5,37.47 v22.48,36.58 v22.48,33.91
ADR11  (via drill 0.38)
  Top 0.152: U6.B1 v18.54,39.12
  Top 0.203: v21.72,39.12 21.72,35.69 22.1,35.31 | JP6.5 19.56,32.77 22.1,35.31 | R30.2 22.61,34.8 22.1,35.31
  Bottom 0.203: v18.54,39.12 v21.72,39.12
ADR12  (via drill 0.38)
  Top 0.152: U7.C1 38.35,40 38.99,40.64 v39.37,40.64
  Top 0.203: JP7.6 42.93,33.53 v43.31,33.91 | v43.31,36.58 R34.2
  Bottom 0.203: v39.37,40.64 39.37,42.93 40.13,43.69 41.78,43.69 44.32,41.15 44.32,37.47 v43.31,36.58 v43.31,33.91
ADR13  (via drill 0.38)
  Top 0.152: U7.B1 v39.37,39.12
  Top 0.203: v42.55,39.12 42.55,35.69 42.93,35.31 | JP7.5 40.39,32.77 42.93,35.31 | R35.2 43.43,34.8 42.93,35.31
  Bottom 0.203: v39.37,39.12 v42.55,39.12
ADR14  (via drill 0.38)
  Top 0.152: U8.C1 59.17,40 59.82,40.64 v60.2,40.64
  Top 0.203: JP8.6 63.75,33.53 v64.14,33.91 | v64.14,36.58 R39.2
  Bottom 0.203: v60.2,40.64 60.2,42.93 60.96,43.69 62.61,43.69 65.15,41.15 65.15,37.47 v64.14,36.58 v64.14,33.91
ADR15  (via drill 0.38)
  Top 0.152: U8.B1 v60.2,39.12
  Top 0.203: v63.37,39.12 63.37,35.69 63.75,35.31 | JP8.5 61.21,32.77 63.75,35.31 | R40.2 64.26,34.8 63.75,35.31
  Bottom 0.203: v60.2,39.12 v63.37,39.12
ADR16  (via drill 0.38)
  Top 0.152: U9.C1 80,40 80.64,40.64 v81.03,40.64
  Top 0.203: JP9.6 84.58,33.53 v84.96,33.91 | v84.96,36.58 R44.2
  Bottom 0.203: v81.03,40.64 81.03,42.93 81.79,43.69 83.44,43.69 85.98,41.15 85.98,37.47 v84.96,36.58 v84.96,33.91
ADR17  (via drill 0.38)
  Top 0.152: U9.B1 v81.03,39.12
  Top 0.203: v84.2,39.12 84.2,35.69 84.58,35.31 | JP9.5 82.04,32.77 84.58,35.31 | R45.2 85.09,34.8 84.58,35.31
  Bottom 0.203: v81.03,39.12 v84.2,39.12
ADR18  (via drill 0.38)
  Top 0.152: U10.C1 100.83,40 101.47,40.64 v101.85,40.64
  Top 0.203: JP10.6 105.41,33.53 v105.79,33.91 | v105.79,36.58 R49.2
  Bottom 0.203: v101.85,40.64 101.85,42.93 102.62,43.69 104.27,43.69 106.81,41.15 106.81,37.47 v105.79,36.58 v105.79,33.91
ADR19  (via drill 0.38)
  Top 0.152: U10.B1 v101.85,39.12
  Top 0.203: v105.03,39.12 105.03,35.69 105.41,35.31 | JP10.5 102.87,32.77 105.41,35.31 | R50.2 105.92,34.8 105.41,35.31
  Bottom 0.203: v101.85,39.12 v105.03,39.12
ADR20  (via drill 0.38)
  Top 0.152: U11.C1 17.52,60.83 18.16,61.47 v18.54,61.47
  Top 0.203: JP11.6 22.1,54.36 v22.48,54.74 | v22.48,57.4 R54.2
  Bottom 0.203: v18.54,61.47 18.54,63.75 19.3,64.52 20.95,64.52 23.5,61.98 23.5,58.29 v22.48,57.4 v22.48,54.74
ADR21  (via drill 0.38)
  Top 0.152: U11.B1 v18.54,59.94
  Top 0.203: v21.72,59.94 21.72,56.52 22.1,56.13 | JP11.5 19.56,53.59 22.1,56.13 | R55.2 22.61,55.63 22.1,56.13
  Bottom 0.203: v18.54,59.94 v21.72,59.94
ADR22  (via drill 0.38)
  Top 0.152: U12.C1 38.35,60.83 38.99,61.47 v39.37,61.47
  Top 0.203: JP12.6 42.93,54.36 v43.31,54.74 | v43.31,57.4 R59.2
  Bottom 0.203: v39.37,61.47 39.37,63.75 40.13,64.52 41.78,64.52 44.32,61.98 44.32,58.29 v43.31,57.4 v43.31,54.74
ADR23  (via drill 0.38)
  Top 0.152: U12.B1 v39.37,59.94
  Top 0.203: v42.55,59.94 42.55,56.52 42.93,56.13 | JP12.5 40.39,53.59 42.93,56.13 | R60.2 43.43,55.63 42.93,56.13
  Bottom 0.203: v39.37,59.94 v42.55,59.94
ADR24  (via drill 0.38)
  Top 0.152: U13.C1 59.17,60.83 59.82,61.47 v60.2,61.47
  Top 0.203: JP13.6 63.75,54.36 v64.14,54.74 | v64.14,57.4 R64.2
  Bottom 0.203: v60.2,61.47 60.2,63.75 60.96,64.52 62.61,64.52 65.15,61.98 65.15,58.29 v64.14,57.4 v64.14,54.74
ADR25  (via drill 0.38)
  Top 0.152: U13.B1 v60.2,59.94
  Top 0.203: v63.37,59.94 63.37,56.52 63.75,56.13 | JP13.5 61.21,53.59 63.75,56.13 | R65.2 64.26,55.63 63.75,56.13
  Bottom 0.203: v60.2,59.94 v63.37,59.94
ADR26  (via drill 0.38)
  Top 0.152: U14.C1 80,60.83 80.64,61.47 v81.03,61.47
  Top 0.203: JP14.6 84.58,54.36 v84.96,54.74 | v84.96,57.4 R69.2
  Bottom 0.203: v81.03,61.47 81.03,63.75 81.79,64.52 83.44,64.52 85.98,61.98 85.98,58.29 v84.96,57.4 v84.96,54.74
ADR27  (via drill 0.38)
  Top 0.152: U14.B1 v81.03,59.94
  Top 0.203: v84.2,59.94 84.2,56.52 84.58,56.13 | JP14.5 82.04,53.59 84.58,56.13 | R70.2 85.09,55.63 84.58,56.13
  Bottom 0.203: v81.03,59.94 v84.2,59.94
ADR28  (via drill 0.38)
  Top 0.152: U15.C1 100.83,60.83 101.47,61.47 v101.85,61.47
  Top 0.203: JP15.6 105.41,54.36 v105.79,54.74 | v105.79,57.4 R74.2
  Bottom 0.203: v101.85,61.47 101.85,63.75 102.62,64.52 104.27,64.52 106.81,61.98 106.81,58.29 v105.79,57.4 v105.79,54.74
ADR29  (via drill 0.38)
  Top 0.152: U15.B1 v101.85,59.94
  Top 0.203: v105.03,59.94 105.03,56.52 105.41,56.13 | JP15.5 102.87,53.59 105.41,56.13 | R75.2 105.92,55.63 105.41,56.13
  Bottom 0.203: v101.85,59.94 v105.03,59.94
ADR30  (via drill 0.38)
  Top 0.152: U16.C1 17.52,81.65 18.16,82.3 v18.54,82.3
  Top 0.203: JP16.6 22.1,75.18 v22.48,75.56 | v22.48,78.23 R79.2
  Bottom 0.203: v18.54,82.3 18.54,84.58 19.3,85.34 20.95,85.34 23.5,82.8 23.5,79.12 v22.48,78.23 v22.48,75.56
ADR31  (via drill 0.38)
  Top 0.152: U16.B1 v18.54,80.77
  Top 0.203: v21.72,80.77 21.72,77.34 22.1,76.96 | JP16.5 19.56,74.42 22.1,76.96 | R80.2 22.61,76.45 22.1,76.96
  Bottom 0.203: v18.54,80.77 v21.72,80.77
ADR32  (via drill 0.38)
  Top 0.152: U17.C1 38.35,81.65 38.99,82.3 v39.37,82.3
  Top 0.203: JP17.6 42.93,75.18 v43.31,75.56 | v43.31,78.23 R84.2
  Bottom 0.203: v39.37,82.3 39.37,84.58 40.13,85.34 41.78,85.34 44.32,82.8 44.32,79.12 v43.31,78.23 v43.31,75.56
ADR33  (via drill 0.38)
  Top 0.152: U17.B1 v39.37,80.77
  Top 0.203: v42.55,80.77 42.55,77.34 42.93,76.96 | JP17.5 40.39,74.42 42.93,76.96 | R85.2 43.43,76.45 42.93,76.96
  Bottom 0.203: v39.37,80.77 v42.55,80.77
ADR34  (via drill 0.38)
  Top 0.152: U18.C1 59.17,81.65 59.82,82.3 v60.2,82.3
  Top 0.203: JP18.6 63.75,75.18 v64.14,75.56 | v64.14,78.23 R89.2
  Bottom 0.203: v60.2,82.3 60.2,84.58 60.96,85.34 62.61,85.34 65.15,82.8 65.15,79.12 v64.14,78.23 v64.14,75.56
ADR35  (via drill 0.38)
  Top 0.152: U18.B1 v60.2,80.77
  Top 0.203: v63.37,80.77 63.37,77.34 63.75,76.96 | JP18.5 61.21,74.42 63.75,76.96 | R90.2 64.26,76.45 63.75,76.96
  Bottom 0.203: v60.2,80.77 v63.37,80.77
ADR36  (via drill 0.38)
  Top 0.152: U19.C1 80,81.65 80.64,82.3 v81.03,82.3
  Top 0.203: JP19.6 84.58,75.18 v84.96,75.56 | v84.96,78.23 R94.2
  Bottom 0.203: v81.03,82.3 81.03,84.58 81.79,85.34 83.44,85.34 85.98,82.8 85.98,79.12 v84.96,78.23 v84.96,75.56
ADR37  (via drill 0.38)
  Top 0.152: U19.B1 v81.03,80.77
  Top 0.203: v84.2,80.77 84.2,77.34 84.58,76.96 | JP19.5 82.04,74.42 84.58,76.96 | R95.2 85.09,76.45 84.58,76.96
  Bottom 0.203: v81.03,80.77 v84.2,80.77
ADR38  (via drill 0.38)
  Top 0.152: U20.C1 100.83,81.65 101.47,82.3 v101.85,82.3
  Top 0.203: JP20.6 105.41,75.18 v105.79,75.56 | v105.79,78.23 R99.2
  Bottom 0.203: v101.85,82.3 101.85,84.58 102.62,85.34 104.27,85.34 106.81,82.8 106.81,79.12 v105.79,78.23 v105.79,75.56
ADR39  (via drill 0.38)
  Top 0.152: U20.B1 v101.85,80.77
  Top 0.203: v105.03,80.77 105.03,77.34 105.41,76.96 | JP20.5 102.87,74.42 105.41,76.96 | R100.2 105.92,76.45 105.41,76.96
  Bottom 0.203: v101.85,80.77 v105.03,80.77
ADR40  (via drill 0.38)
  Top 0.152: U21.C1 17.52,102.48 18.16,103.12 v18.54,103.12
  Top 0.203: JP21.6 22.1,96.01 v22.48,96.39 | v22.48,99.06 R104.2
  Bottom 0.203: v18.54,103.12 18.54,105.41 19.3,106.17 20.95,106.17 23.5,103.63 23.5,99.95 v22.48,99.06 v22.48,96.39
ADR41  (via drill 0.38)
  Top 0.152: U21.B1 v18.54,101.6
  Top 0.203: v21.72,101.6 21.72,98.17 22.1,97.79 | JP21.5 19.56,95.25 22.1,97.79 | R105.2 22.61,97.28 22.1,97.79
  Bottom 0.203: v18.54,101.6 v21.72,101.6
ADR42  (via drill 0.38)
  Top 0.152: U22.C1 38.35,102.48 38.99,103.12 v39.37,103.12
  Top 0.203: JP22.6 42.93,96.01 v43.31,96.39 | v43.31,99.06 R109.2
  Bottom 0.203: v39.37,103.12 39.37,105.41 40.13,106.17 41.78,106.17 44.32,103.63 44.32,99.95 v43.31,99.06 v43.31,96.39
ADR43  (via drill 0.38)
  Top 0.152: U22.B1 v39.37,101.6
  Top 0.203: v42.55,101.6 42.55,98.17 42.93,97.79 | JP22.5 40.39,95.25 42.93,97.79 | R110.2 43.43,97.28 42.93,97.79
  Bottom 0.203: v39.37,101.6 v42.55,101.6
ADR44  (via drill 0.38)
  Top 0.152: U23.C1 59.17,102.48 59.82,103.12 v60.2,103.12
  Top 0.203: JP23.6 63.75,96.01 v64.14,96.39 | v64.14,99.06 R114.2
  Bottom 0.203: v60.2,103.12 60.2,105.41 60.96,106.17 62.61,106.17 65.15,103.63 65.15,99.95 v64.14,99.06 v64.14,96.39
ADR45  (via drill 0.38)
  Top 0.152: U23.B1 v60.2,101.6
  Top 0.203: v63.37,101.6 63.37,98.17 63.75,97.79 | JP23.5 61.21,95.25 63.75,97.79 | R115.2 64.26,97.28 63.75,97.79
  Bottom 0.203: v60.2,101.6 v63.37,101.6
ADR46  (via drill 0.38)
  Top 0.152: U24.C1 80,102.48 80.64,103.12 v81.03,103.12
  Top 0.203: JP24.6 84.58,96.01 v84.96,96.39 | v84.96,99.06 R119.2
  Bottom 0.203: v81.03,103.12 81.03,105.41 81.79,106.17 83.44,106.17 85.98,103.63 85.98,99.95 v84.96,99.06 v84.96,96.39
ADR47  (via drill 0.38)
  Top 0.152: U24.B1 v81.03,101.6
  Top 0.203: v84.2,101.6 84.2,98.17 84.58,97.79 | JP24.5 82.04,95.25 84.58,97.79 | R120.2 85.09,97.28 84.58,97.79
  Bottom 0.203: v81.03,101.6 v84.2,101.6
ADR48  (via drill 0.38)
  Top 0.152: U25.C1 100.83,102.48 101.47,103.12 v101.85,103.12
  Top 0.203: JP25.6 105.41,96.01 v105.79,96.39 | v105.79,99.06 R124.2
  Bottom 0.203: v101.85,103.12 101.85,105.41 102.62,106.17 104.27,106.17 106.81,103.63 106.81,99.95 v105.79,99.06 v105.79,96.39
ADR49  (via drill 0.38)
  Top 0.152: U25.B1 v101.85,101.6
  Top 0.203: v105.03,101.6 105.03,98.17 105.41,97.79 | JP25.5 102.87,95.25 105.41,97.79 | R125.2 105.92,97.28 105.41,97.79
  Bottom 0.203: v101.85,101.6 v105.03,101.6
GND  (via drill 0.38)
  Top 0.152: U1.A1 17.52,17.15 17.91,16.76 v18.54,16.76 | U1.A2 v17.02,16.76 | 25.27,14.46 R5.1
  Top 0.203: JP1.7 24.64,12.83 | 25.49,13.68 R5.1
  Top 0.254: v18.03,13.21 C1.2
  Bottom 0.254: v17.02,16.76 17.02,13.97 v18.03,13.21
  pour Top: 14.73,16 14.73,20.57 19.3,20.57 19.3,16
  pour Top (isolate 0.305): 6.86,14.48 6.86,6.86 27.18,6.86 27.18,27.18 6.86,27.18 6.86,14.73 13.21,14.73 13.21,22.1 20.83,22.1 20.83,14.48
  pour Bottom (isolate 0.305): 6.86,14.48 6.86,6.86 27.18,6.86 27.18,27.18 6.86,27.18 6.86,14.73 13.21,14.73 13.21,22.1 20.83,22.1 20.83,14.48
  pour Bottom: 14.73,20.57 19.3,20.57 19.3,16 14.73,16
GND1  (via drill 0.38)
  Top 0.152: U2.A1 38.35,17.15 38.73,16.76 v39.37,16.76 | U2.A2 v37.85,16.76 | 46.1,14.46 R10.1
  Top 0.203: JP2.7 45.47,12.83 | 46.32,13.68 R10.1
  Top 0.254: v38.86,13.21 C2.2
  Bottom 0.254: v37.85,16.76 37.85,13.97 v38.86,13.21
  pour Top: 35.56,16 35.56,20.57 40.13,20.57 40.13,16
  pour Top (isolate 0.305): 27.69,14.48 27.69,6.86 48.01,6.86 48.01,27.18 27.69,27.18 27.69,14.73 34.04,14.73 34.04,22.1 41.66,22.1 41.66,14.48
  pour Bottom (isolate 0.305): 27.69,14.48 27.69,6.86 48.01,6.86 48.01,27.18 27.69,27.18 27.69,14.73 34.04,14.73 34.04,22.1 41.66,22.1 41.66,14.48
  pour Bottom: 35.56,20.57 40.13,20.57 40.13,16 35.56,16
GND2  (via drill 0.38)
  Top 0.152: U3.A1 59.17,17.15 59.56,16.76 v60.2,16.76 | U3.A2 v58.67,16.76 | 66.93,14.46 R15.1
  Top 0.203: JP3.7 66.29,12.83 | 67.14,13.68 R15.1
  Top 0.254: v59.69,13.21 C3.2
  Bottom 0.254: v58.67,16.76 58.67,13.97 v59.69,13.21
  pour Top: 56.39,16 56.39,20.57 60.96,20.57 60.96,16
  pour Top (isolate 0.305): 48.51,14.48 48.51,6.86 68.83,6.86 68.83,27.18 48.51,27.18 48.51,14.73 54.86,14.73 54.86,22.1 62.48,22.1 62.48,14.48
  pour Bottom (isolate 0.305): 48.51,14.48 48.51,6.86 68.83,6.86 68.83,27.18 48.51,27.18 48.51,14.73 54.86,14.73 54.86,22.1 62.48,22.1 62.48,14.48
  pour Bottom: 56.39,20.57 60.96,20.57 60.96,16 56.39,16
GND3  (via drill 0.38)
  Top 0.152: U4.A1 80,17.15 80.39,16.76 v81.03,16.76 | U4.A2 v79.5,16.76 | 87.76,14.46 R20.1
  Top 0.203: JP4.7 87.12,12.83 | 87.97,13.68 R20.1
  Top 0.254: v80.52,13.21 C4.2
  Bottom 0.254: v79.5,16.76 79.5,13.97 v80.52,13.21
  pour Top: 77.22,16 77.22,20.57 81.79,20.57 81.79,16
  pour Top (isolate 0.305): 69.34,14.48 69.34,6.86 89.66,6.86 89.66,27.18 69.34,27.18 69.34,14.73 75.69,14.73 75.69,22.1 83.31,22.1 83.31,14.48
  pour Bottom (isolate 0.305): 69.34,14.48 69.34,6.86 89.66,6.86 89.66,27.18 69.34,27.18 69.34,14.73 75.69,14.73 75.69,22.1 83.31,22.1 83.31,14.48
  pour Bottom: 77.22,20.57 81.79,20.57 81.79,16 77.22,16
GND4  (via drill 0.38)
  Top 0.152: U5.A1 100.83,17.15 101.22,16.76 v101.85,16.76 | U5.A2 v100.33,16.76 | 108.58,14.46 R25.1
  Top 0.203: JP5.7 107.95,12.83 | 108.8,13.68 R25.1
  Top 0.254: v101.35,13.21 C5.2
  Bottom 0.254: v100.33,16.76 100.33,13.97 v101.35,13.21
  pour Top: 98.04,16 98.04,20.57 102.62,20.57 102.62,16
  pour Top (isolate 0.305): 90.17,14.48 90.17,6.86 110.49,6.86 110.49,27.18 90.17,27.18 90.17,14.73 96.52,14.73 96.52,22.1 104.14,22.1 104.14,14.48
  pour Bottom (isolate 0.305): 90.17,14.48 90.17,6.86 110.49,6.86 110.49,27.18 90.17,27.18 90.17,14.73 96.52,14.73 96.52,22.1 104.14,22.1 104.14,14.48
  pour Bottom: 98.04,20.57 102.62,20.57 102.62,16 98.04,16
GND5  (via drill 0.38)
  Top 0.152: U6.A1 17.52,37.98 17.91,37.59 v18.54,37.59 | U6.A2 v17.02,37.59 | 25.27,35.29 R30.1
  Top 0.203: JP6.7 24.64,33.66 | 25.49,34.51 R30.1
  Top 0.254: v18.03,34.04 C6.2
  Bottom 0.254: v17.02,37.59 17.02,34.8 v18.03,34.04
  pour Top: 14.73,36.83 14.73,41.4 19.3,41.4 19.3,36.83
  pour Top (isolate 0.305): 6.86,35.31 6.86,27.69 27.18,27.69 27.18,48.01 6.86,48.01 6.86,35.56 13.21,35.56 13.21,42.93 20.83,42.93 20.83,35.31
  pour Bottom (isolate 0.305): 6.86,35.31 6.86,27.69 27.18,27.69 27.18,48.01 6.86,48.01 6.86,35.56 13.21,35.56 13.21,42.93 20.83,42.93 20.83,35.31
  pour Bottom: 14.73,41.4 19.3,41.4 19.3,36.83 14.73,36.83
GND6  (via drill 0.38)
  Top 0.152: U7.A1 38.35,37.98 38.73,37.59 v39.37,37.59 | U7.A2 v37.85,37.59 | 46.1,35.29 R35.1
  Top 0.203: JP7.7 45.47,33.66 | 46.32,34.51 R35.1
  Top 0.254: v38.86,34.04 C7.2
  Bottom 0.254: v37.85,37.59 37.85,34.8 v38.86,34.04